# Altium PCB PCB_WallSwitch_Core.PcbDoc (part 1 of 2)
Units mm, origin at the board's own origin, x right, y up, seen from the top; angles counter-clockwise.
Board outline 41 x 41 mm, 4 copper layers (Top Layer, Ground Plane, Power Plane, Bottom Layer), stack 1.57 mm thick; 34 components, 47 nets, 196 pads, 64 vias.
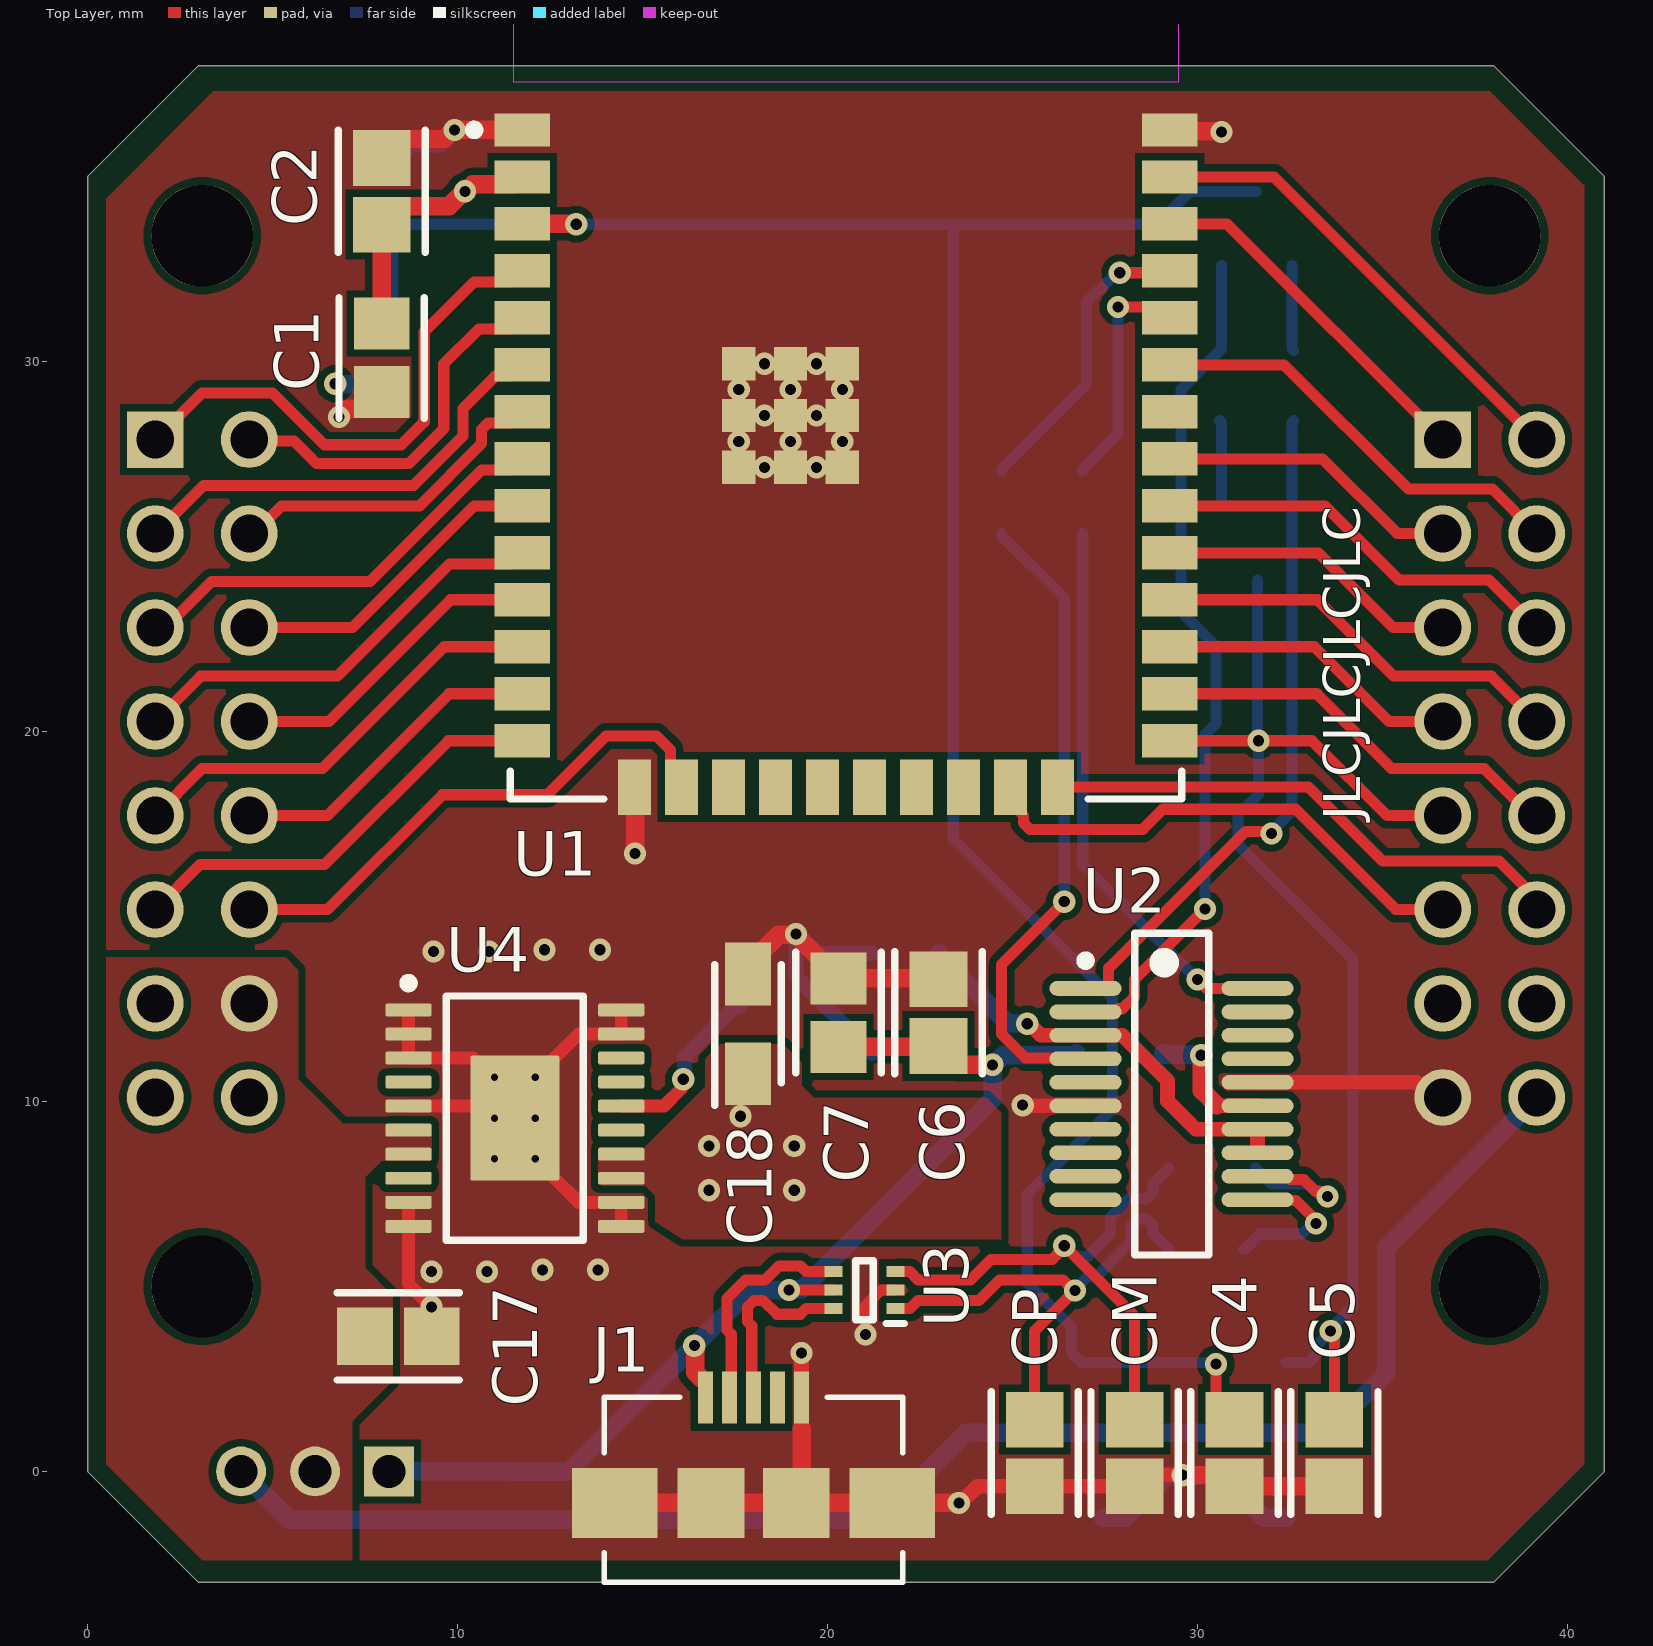
[diagram p0: Top Layer view]
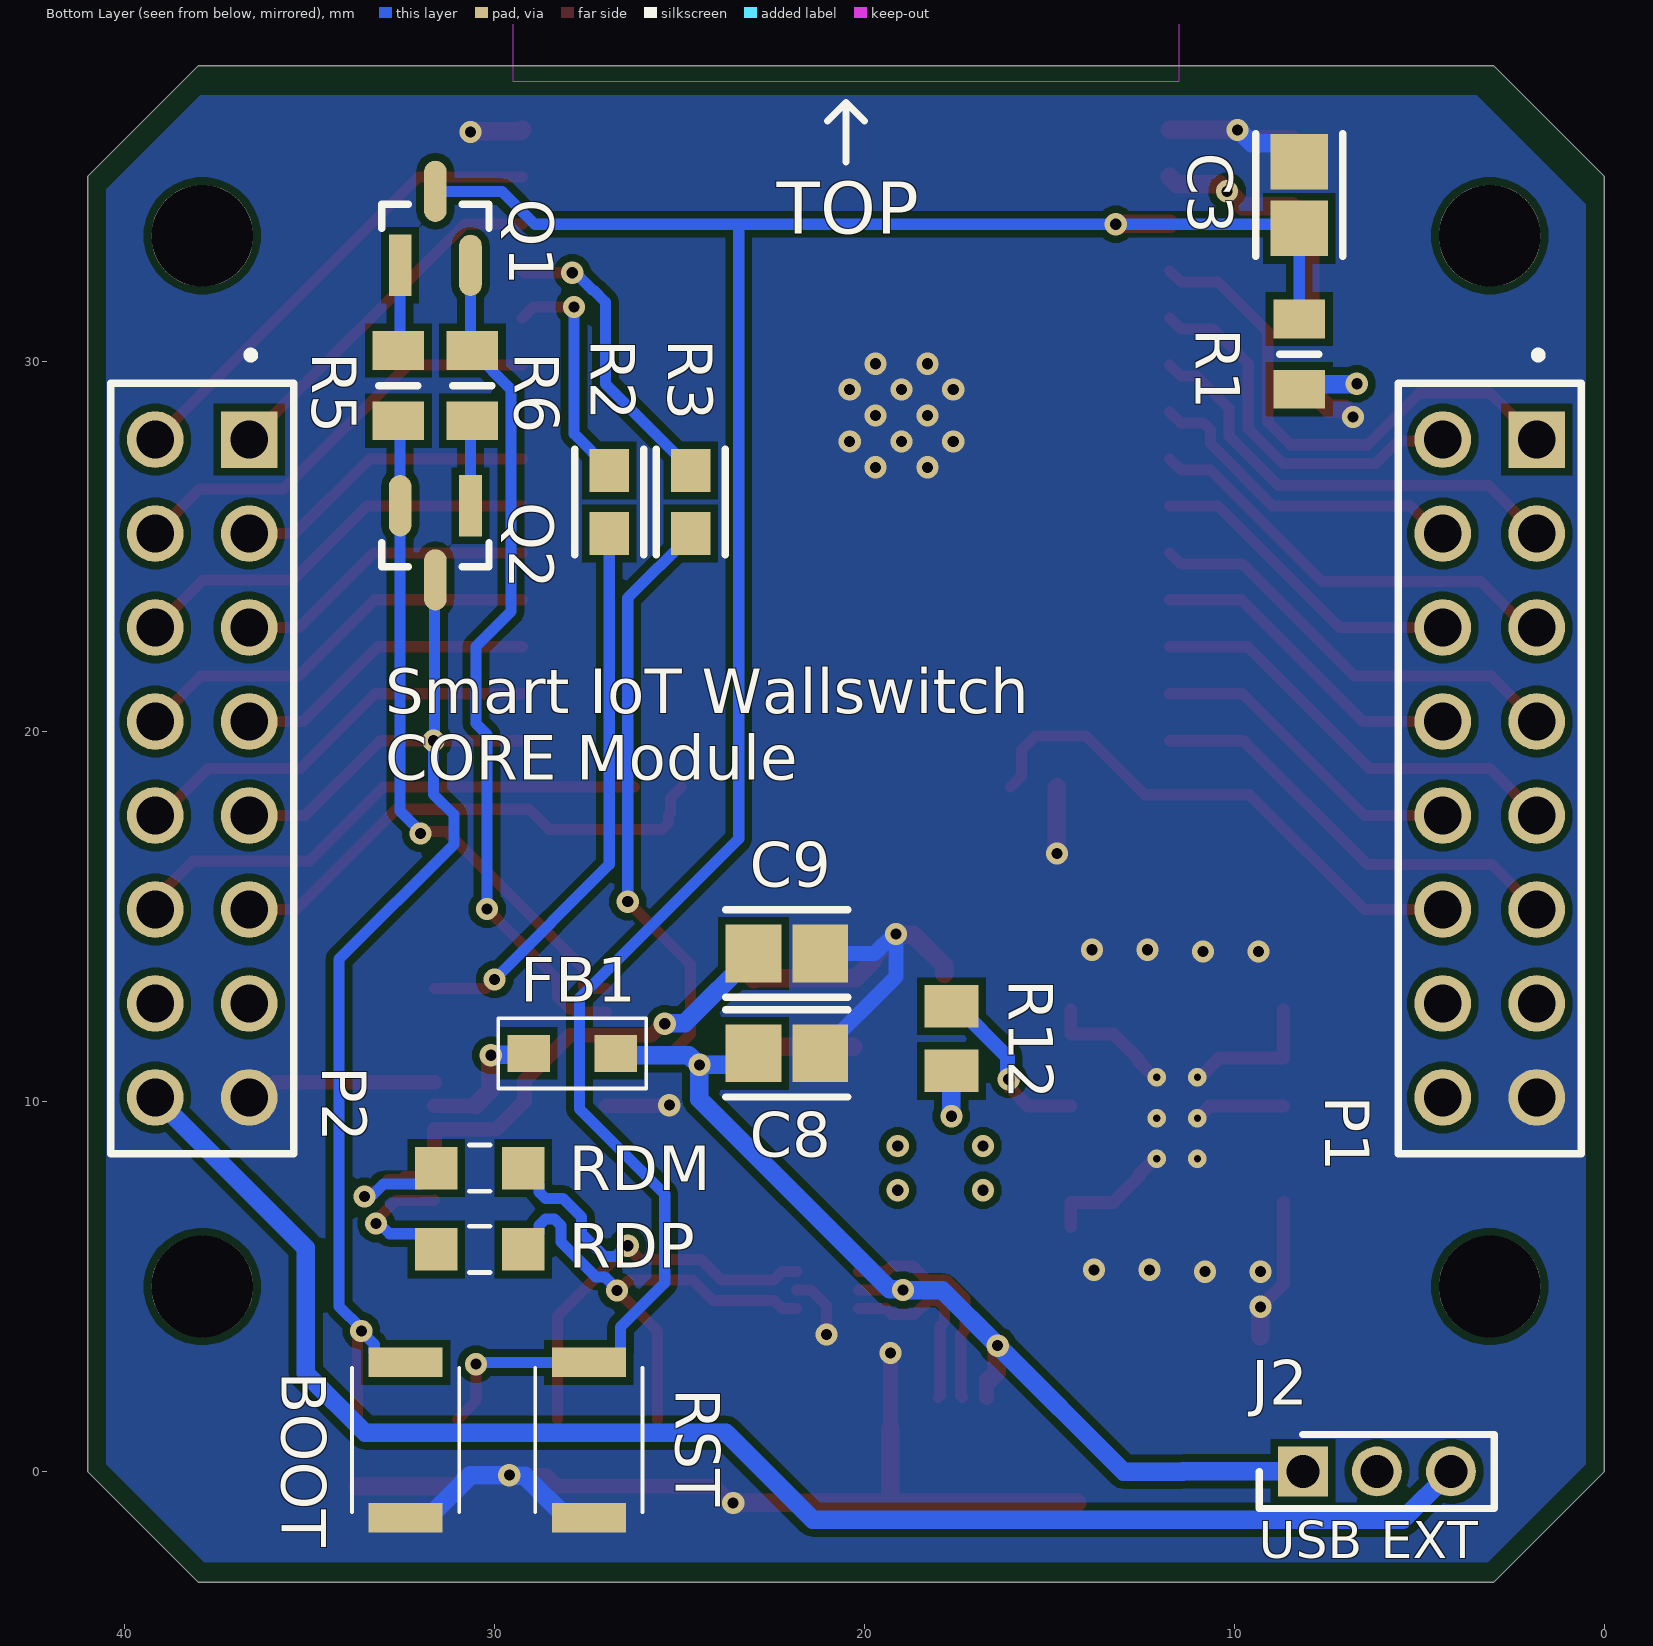
[diagram p1: Bottom Layer view, seen from below]
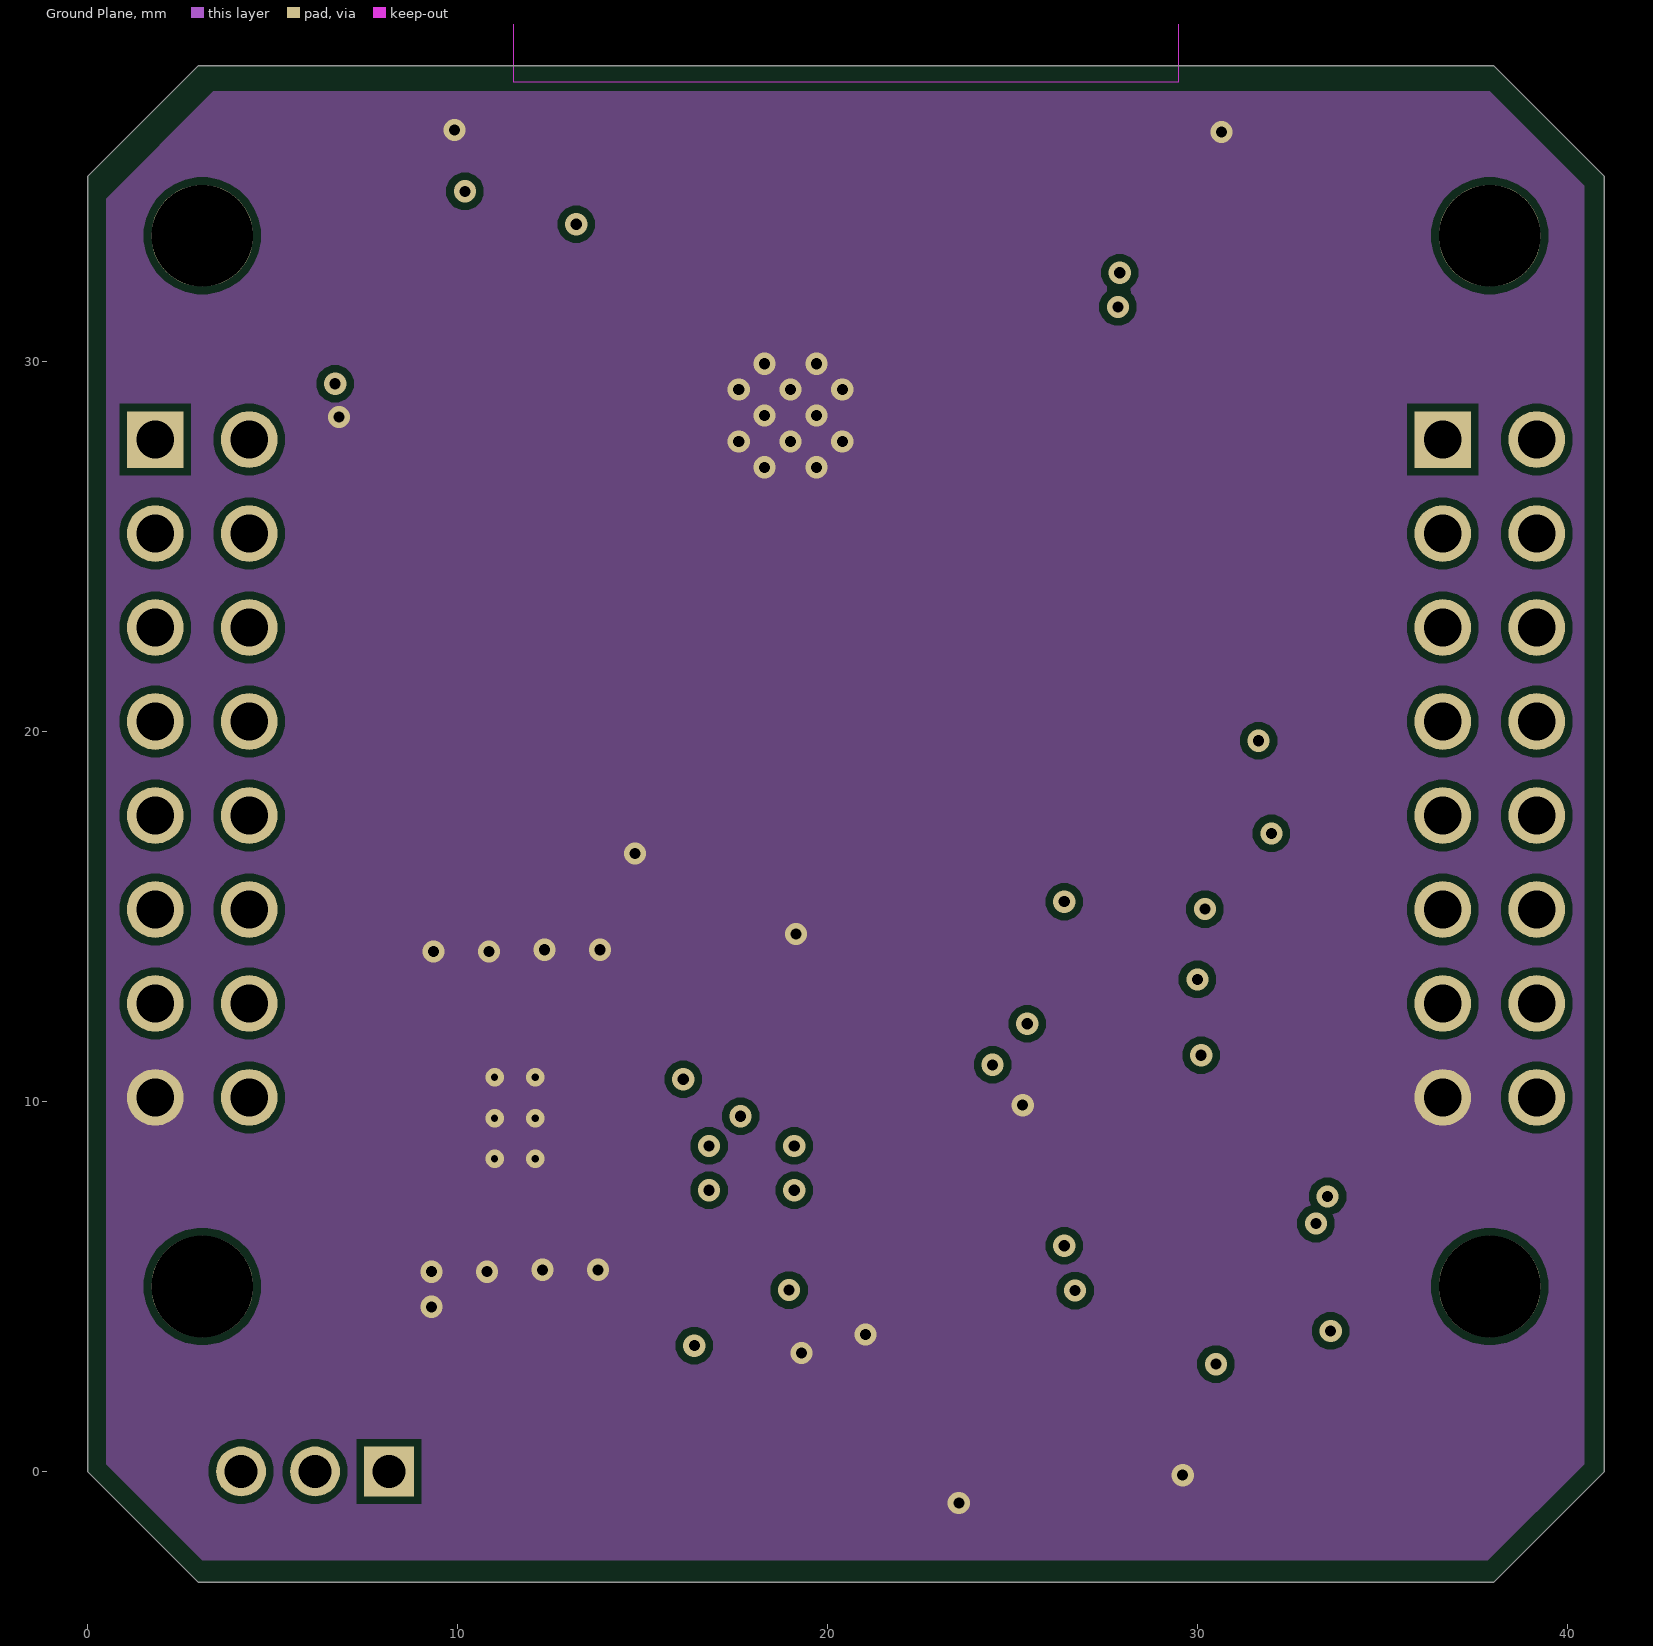
[diagram p2: Ground Plane]
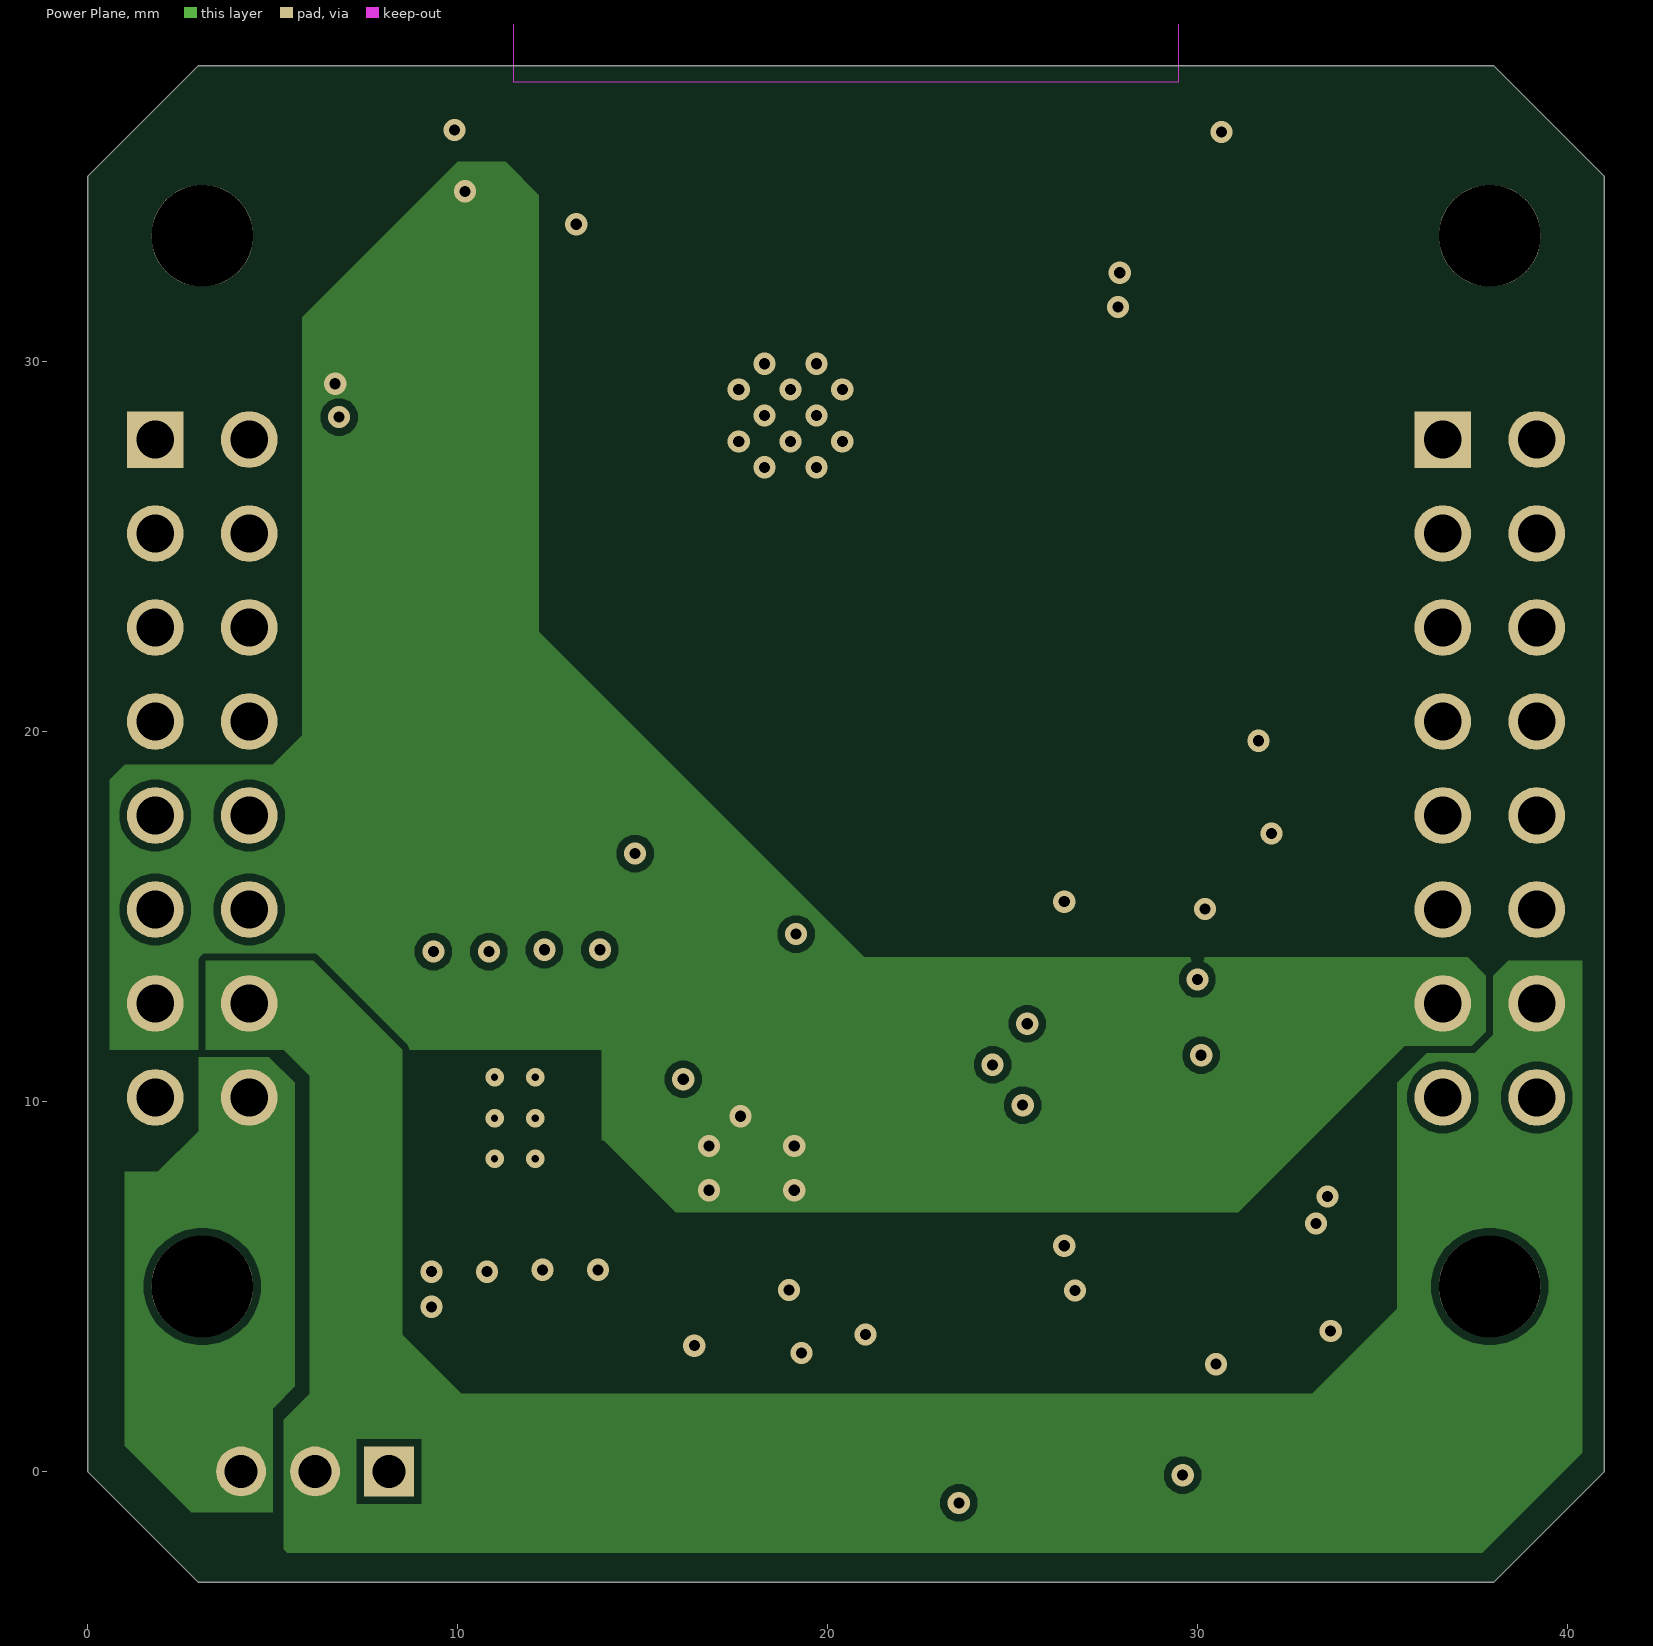
[diagram p3: Power Plane]
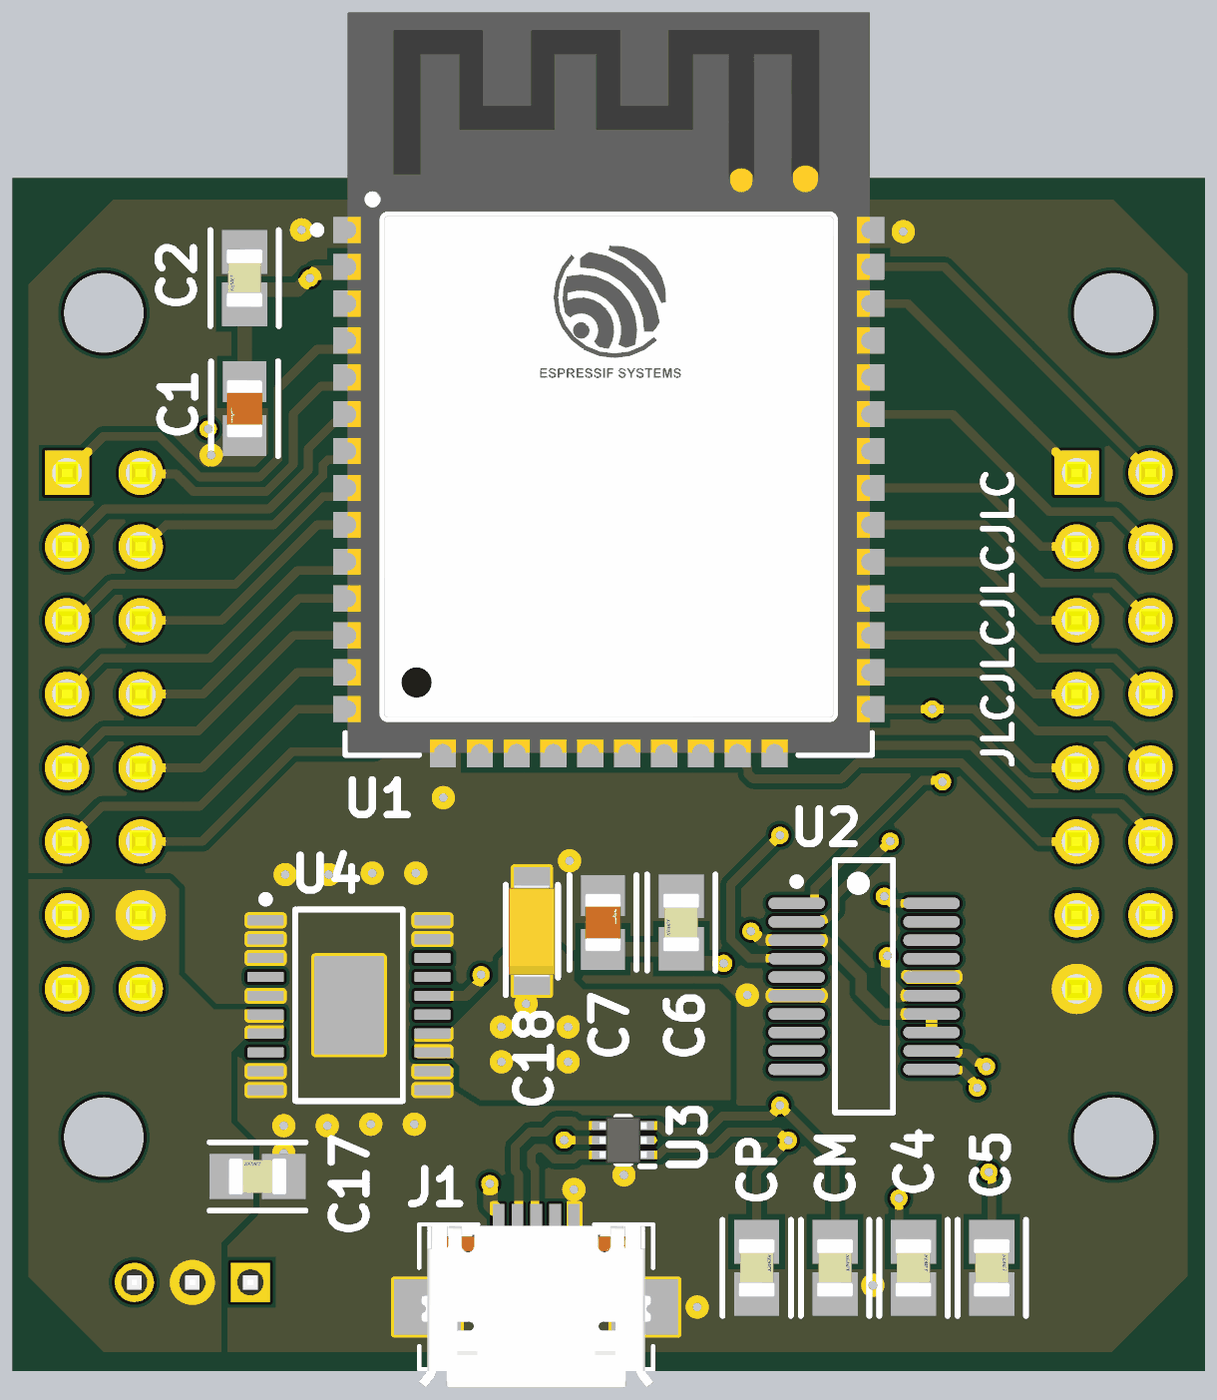
[diagram p4: 3D render of the assembled board from above, using the file's embedded part models]
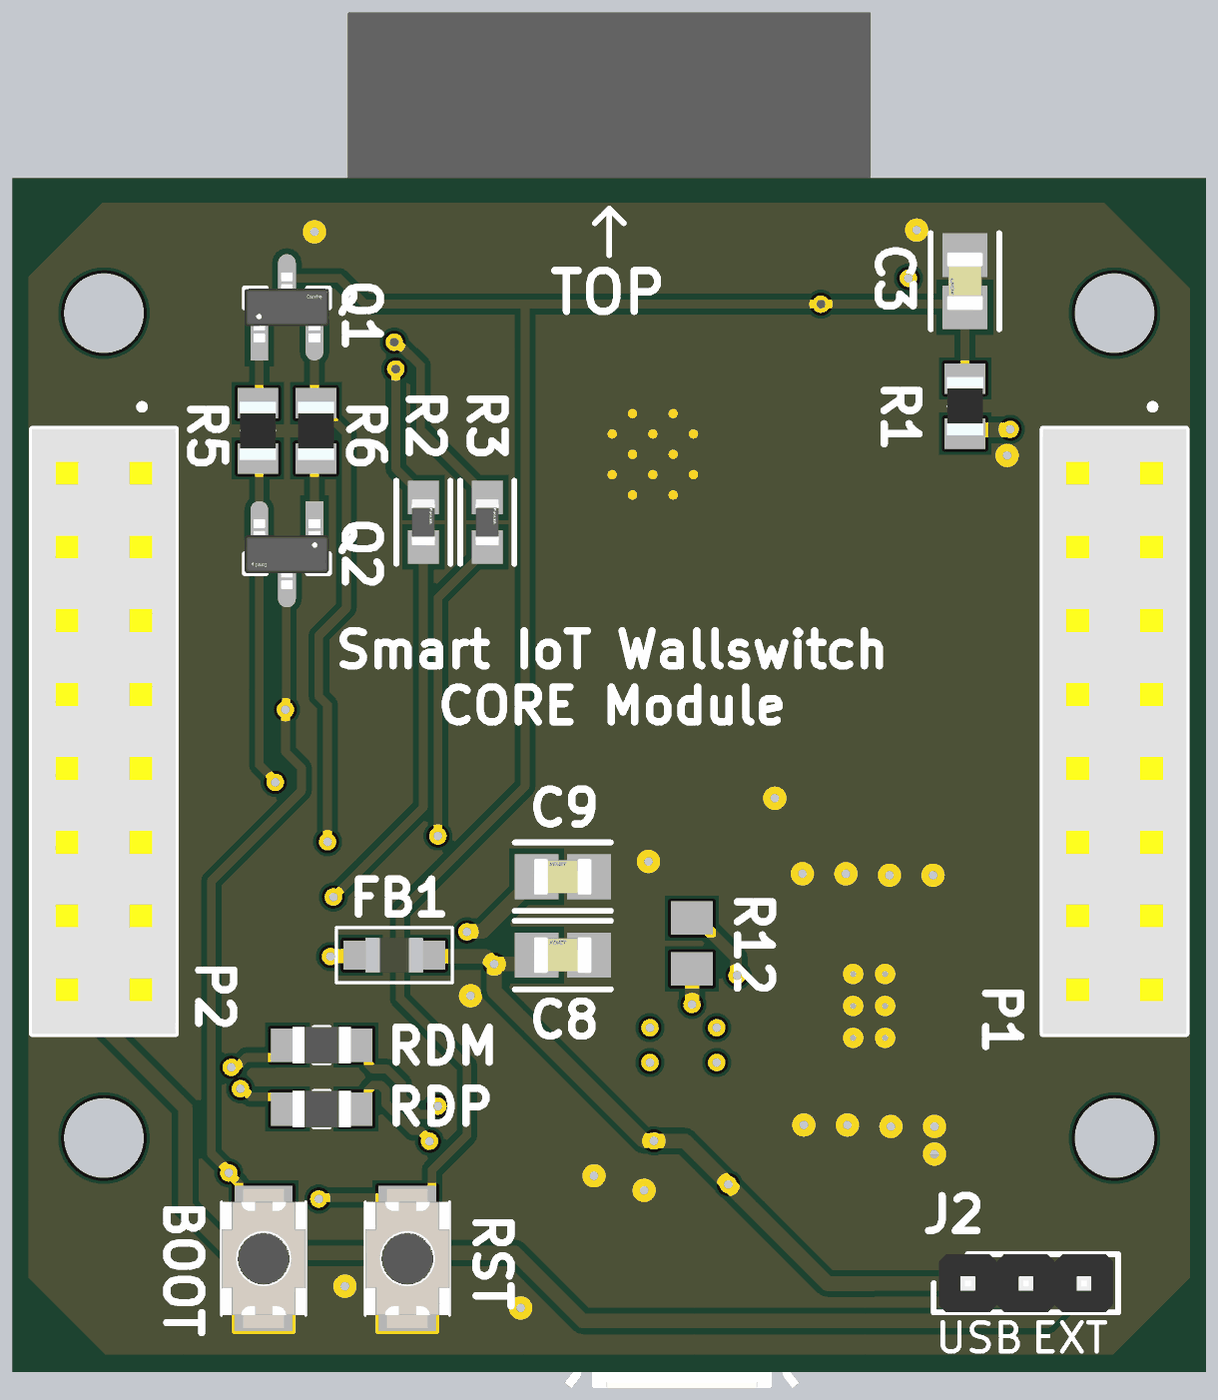
[diagram p5: 3D render of the assembled board from below, using the file's embedded part models]

## Layer stack, top to bottom
Top Solder: solder mask 0.015, Solder Resist, Dk 3.8
Top Layer: signal copper 0.035
Dielectric 2: prepreg 0.2, 7628, Dk 4.6
Ground Plane: signal copper 0.0175
Dielectric 1: dielectric 1.065, FR-4, Dk 4.5
Power Plane: signal copper 0.0175
Dielectric 3: prepreg 0.2, 7628, Dk 4.6
Bottom Layer: signal copper 0.035
Bottom Solder: solder mask 0.015, Solder Resist, Dk 3.8

## Board outline
0,0 3,-3 38,-3 41,0 41,35 38,38 3,38 0,35

## Design rules (kind name [scope] priority, off if disabled: settings)
BoardOutlineClearance [All] p1: gap=0.2 ignorepadtopadclearanceinfootprint=FALSE except(0.4: Arc-SplitBarrior Arc-SplitContinuation Track-SplitBarrior Track-SplitContinuation SMDPad-SplitBarrior SMDPad-SplitContinuation THPad-SplitBarrior THPad-SplitContinuation Via-SplitBarrior Via-SplitContinuation Fill-SplitBarrior Fill-SplitContinuation Poly-SplitBarrior Poly-SplitContinuation Region-SplitBarrior Region-SplitContinuation Text-SplitBarrior Text-SplitContinuation)
Clearance "Clearance Bottom Layer" [OnLayer('Bottom Layer')] p1: gap=0.2 ignorepadtopadclearanceinfootprint=TRUE except(0.254: Arc-Text Track-Text SMDPad-Text THPad-Text Via-Text Fill-Text Poly-Text Region-Text Text-Text)
Clearance "Clearance Top Layer" [OnLayer('Top Layer')] p2: gap=0.2 ignorepadtopadclearanceinfootprint=TRUE except(0.254: Arc-Text Track-Text SMDPad-Text THPad-Text Via-Text Fill-Text Poly-Text Region-Text Text-Text)
Clearance [All] p3: gap=0.2 ignorepadtopadclearanceinfootprint=FALSE except(0.089: Arc-Arc Arc-Track Arc-SMDPad Track-Track Track-SMDPad SMDPad-SMDPad; 0.127: Arc-Via Track-Via SMDPad-Via THPad-Via Via-Via; 0.254: Arc-Text Track-Text SMDPad-Text THPad-Text Via-Text Fill-Text Poly-Text Region-Text Text-Text)
DiffPairsRouting [All] p1: maxlimit=0.254 minlimit=0.2 mostfreqgap=0.254 toplayer_minwidth=0.3 toplayer_maxwidth=0.381 toplayer_prefwidth=0.381 midlayer1_mingap=0.254 midlayer1_minwidth=0.381 midlayer1_maxwidth=0.381 midlayer1_prefwidth=0.381 midlayer2_mingap=0.254 midlayer2_minwidth=0.381 midlayer2_maxwidth=0.381 midlayer2_prefwidth=0.381 bottomlayer_minwidth=0.3 bottomlayer_maxwidth=0.381 bottomlayer_prefwidth=0.381 maxuncoupledlength=12.7
HoleSize [All] p1: absolutevalues=TRUE maxlimit=6.3 minlimit=0.2 maxpercent=80.000 minpercent=20.000
MinimumAnnularRing [All] p1: minimumring=0.076
MinimumSolderMaskSliver [All] p1: minsoldermaskwidth=0.1
PlaneConnect [All] p1: planeconnectstyle=Direct reliefexpansion=0.508 reliefentries=4 reliefconductorwidth=0.254 reliefairgap=0.254
PolygonConnect PolygonConnect_1 [All] p1: connectstyle=Direct reliefconductorwidth=0.508 reliefentries=4 polygonreliefangle="90 Angle" airgapwidth=0.254
RoutingCorners [All] p1: cornerstyle=Round minsetback=2.54 maxsetback=2.54
RoutingVias [All] p1: holewidth=0.5 width=1 viastyle="Through Hole" minholewidth=0.2 minwidth=0.45 maxholewidth=1 maxwidth=2
SilkToSilkClearance [All] p1: silktosilkclearance=0.1
SilkToSolderMaskClearance [IsPad] p1: minsilkscreentomaskgap=0.1 clearancetoexposedcopper=TRUE
SolderMaskExpansion [All] p1: expansion=0.102 istentingtop=FALSE
Width [All] p1: maxlimit=2.54 minlimit=0.089 preferedwidth=0.381
23 further rules are at their usual default settings.

## Classes and differential pairs
differential pair USB_D: +USB_D_P -USB_D_N
differential pair USB_D1: +USB_D1_P -USB_D1_N
differential pair USB_D0: +USB_D0_P -USB_D0_N

## Components (designator, comment, footprint, x,y, rotation, side; value= is the part's Value field where it differs from the comment)
BOOT "SKRKAHE020" SKRKAEE020 32.4,0.85 r270 bottom
C1 "GRM21BR61A226ME51L" FP-GRM21B-0_15-IPC_A 7.95,30.1 r270 top
C2 "C0805C104K5RAC7411" FP-C0805C-DN-IPC_A 7.95,34.6 r90 top
C3 "C0805C104K5RAC7411" FP-C0805C-DN-IPC_A 8.25,34.5 r90 bottom
C4 "C0805C104K5RAC7411" FP-C0805C-DN-IPC_A 31,0.5 r270 top
C5 "C0805C104K5RAC7411" FP-C0805C-DN-IPC_A 33.7,0.5 r270 top
C6 "C0805C104K5RAC7411" FP-C0805C-DN-IPC_A 23,12.4 r90 top
C7 "GRM21BR71C475KE51L" FP-GRM21B-0_15-IPC_A 20.3,12.4 r90 top
C8 "C0805C103J5RAC7025" FP-C0805C-DN-IPC_A 22.1,11.3 r180 bottom
C9 "C0805C104K5RAC7411" FP-C0805C-DN-IPC_A 22.1,14 r180 bottom
C17 "C0805C473K5RACAUTO" FP-C0805C-DN-IPC_A 8.4,3.65 r0 top
C18 "T495A156K010ATE1K0" CAPPM3216X180N 17.85,12.1 r90 top
CM "C0805C470J5RACTU" FP-C0805C-DN-IPC_A 28.3,0.5 r270 top
CP "C0805C470J5RACTU" FP-C0805C-DN-IPC_A 25.6,0.5 r270 top
FB1 "74279202" SMD-0805 27.9,11.3 r0 bottom
J1 "10104110-0001LF" 101041100001LF 18,-0.85 r0 top
J2 "M22-2510346" HDRV3W50P0X200_1X3_600X200X525P 8.15,0 r180 bottom
P1 "SSQ-108-03-G-D" SAMTEC_SSQ-108-XX-X-D 3.1,19 r90 bottom locked
P2 "SSQ-108-03-G-D" SAMTEC_SSQ-108-XX-X-D 37.9,19 r90 bottom locked
Q1 "SS8050-G" FP-SS8050-G-IPC_A 31.6,33.6 r90 bottom
Q2 "SS8050-G" FP-SS8050-G-IPC_A 31.6,25.1 r270 bottom
R1 "ERJ-UP6J103V" RESC2012X70N 8.25,30.2 r90 bottom
R2 "ERJ-3GEYJ102V" FP-ERJ3G-IPC_A 26.9,26.2 r270 bottom
R3 "ERJ-3GEYJ102V" FP-ERJ3G-IPC_A 24.7,26.2 r270 bottom
R5 "ERJ-UP6J103V" RESC2012X70N 32.6,29.35 r90 bottom
R6 "ERJ-UP6J103V" RESC2012X70N 30.6,29.35 r270 bottom
R12 "ERJ-6ENF2493V" RESC2013X70X40NL20T20 17.65,11.7 r90 bottom
RDM "ERJ-P06F27R0V" RES_ERJP06F27R0V 30.4,8.2 r0 bottom
RDP "ERJ-P06F27R0V" RES_ERJP06F27R0V 30.4,6 r0 bottom
RST "SKRKAHE020" SKRKAEE020 27.45,0.85 r270 bottom
U1 "ESP32-WROOM-32D-N16" FP-ESP32-WROOM-32D_16MB-MFG 20.5,31 r0 top
U2 "FT231XS-U" SSOP-20_L 29.3,10.2 r0 top
U3 "RCLAMP0502A.TCT" SOTFL50P162X60-6N 21,4.9 r180 top
U4 "TPS76733QPWPRQ1" PWP0020L_L 11.55,9.55 r0 top

## Footprints (in the part's own frame and the unit in brackets; to place one, negate y for a bottom-side part, rotate by r counter-clockwise, add the part's x,y. Pads: shape width x height; smd on the part's side, far side on the other; paste and mask are expansions set on the pad)
101041100001LF [mm]
  rect 0.4x1.4 smd: 1(-1.3,2.85) 2(-0.65,2.85) 3(0,2.85) 4(0.65,2.85) 5(1.3,2.85)
  rect 1.8x1.9 smd: 6(-1.15,0) 7(1.15,0)
  rect 2.3x1.9 smd: 8(-3.75,0) 9(3.75,0)
  silkscreen extent -4.03,-2.15 4.03,2.85, body extent -4.04,-2.77 4.04,2.8, height 2.76
CAPPM3216X180N [mm]
  rect 1.7x1.25 smd: 1(-1.35,0) 2(1.35,0)
  silkscreen extent -2.2,-0.9 1.6,0.9, body extent -1.6,-0.8 1.6,0.8, height 1.8
FP-C0805C-DN-IPC_A [mm]
  rect 1.505x1.556 smd paste+0 mask+0: 1(-0.901,0) 2(0.901,0)
  silkscreen extent -1.65,-1.18 1.65,1.18, body extent -2.15,-1.28 2.15,1.28, height 0.25
FP-ERJ3G-IPC_A [mil]
  rect 45.53x41.82 smd paste+0 mask+0: 1(-33.5,0) 2(33.5,0)
  silkscreen extent -56,-37 56,37, body extent -31,-16 31,16, height 22
FP-ESP32-WROOM-32D_16MB-MFG [mm]
  rect 1.5x0.9 smd paste+0 mask+0: 1(-8.75,5.26) 2(-8.75,3.99) 3(-8.75,2.72) 4(-8.75,1.45) 5(-8.75,0.18) 6(-8.75,-1.09) 7(-8.75,-2.36) 8(-8.75,-3.63) 9(-8.75,-4.9) 10(-8.75,-6.17) 11(-8.75,-7.44) 12(-8.75,-8.71) 13(-8.75,-9.98) 14(-8.75,-11.25) 25(8.75,-11.25) 26(8.75,-9.98) 27(8.75,-8.71) 28(8.75,-7.44) 29(8.75,-6.17) 30(8.75,-4.9) 31(8.75,-3.63) 32(8.75,-2.36) 33(8.75,-1.09) 34(8.75,0.18) 35(8.75,1.45) 36(8.75,2.72) 37(8.75,3.99) 38(8.75,5.26)
  rect 0.9x1.5 smd paste+0 mask+0: 15(-5.715,-12.5) 16(-4.445,-12.5) 17(-3.175,-12.5) 18(-1.905,-12.5) 19(-0.635,-12.5) 20(0.635,-12.5) 21(1.905,-12.5) 22(3.175,-12.5) 23(4.445,-12.5) 24(5.715,-12.5)
  rect 0.9x0.9 smd paste+0 mask+0: 39(-2.9,-3.86) 39(-2.9,-2.46) 39(-2.9,-1.06) 39(-1.5,-3.86) 39(-1.5,-2.46) 39(-1.5,-1.06) 39(-0.1,-3.86) 39(-0.1,-2.46) 39(-0.1,-1.06)
  Keep-Out Layer region: -9,6.56 9,6.56 9,12.75 -9,12.75
  silkscreen extent -10.17,-12.83 9.08,5.38, body extent -9.6,-13.35 9.6,12.93, height 0.25
FP-GRM21B-0_15-IPC_A [mm]
  rect 1.406x1.508 smd paste+0 mask+0: 1(-0.926,0) 2(0.926,0)
  silkscreen extent -1.63,-1.15 1.63,1.15, body extent -2.13,-1.25 2.13,1.25, height 0.25
FP-SS8050-G-IPC_A [mm]
  rect 1.657x0.612 smd paste+0 mask+0: 1(-1.001,0.95)
  rrect100% 1.657x0.612 smd paste+0 mask+0: 2(-1.001,-0.95) 3(1.001,0)
  silkscreen extent 0,-1.45 0.65,1.45, body extent -1.21,-1.45 1.21,1.45, height 1.15
HDRV3W50P0X200_1X3_600X200X525P [mm]
  rect 1.35x1.35 hole 0.9: 1(0,0)
  round 1.35 hole 0.9: 2(2,0) 3(4,0)
  silkscreen extent -1.17,-1 5.18,1, body extent -1,-1 5,1, height 4.91
PWP0020L_L [mm] "SOP, 20-Leads, Body 6.6x4.5mm, Pitch 0.65mm, Thermal Pad 3.38x2.4mm, IPC High Density"
  rrect29% 1.25x0.35 smd: 1(-2.875,2.925) 2(-2.875,2.275) 3(-2.875,1.625) 4(-2.875,0.975) 5(-2.875,0.325) 6(-2.875,-0.325) 7(-2.875,-0.975) 8(-2.875,-1.625) 9(-2.875,-2.275) 10(-2.875,-2.925) 11(2.875,-2.925) 12(2.875,-2.275) 13(2.875,-1.625) 14(2.875,-0.975) 15(2.875,-0.325) 16(2.875,0.325) 17(2.875,0.975) 18(2.875,1.625) 19(2.875,2.275) 20(2.875,2.925)
  rrect4% 2.4x3.38 smd: 21(0,0)
  silkscreen extent -3,-3.3 1.85,3.77, body extent -2.25,-3.3 2.25,3.3, height 1.2
RES_ERJP06F27R0V [mm]
  rect 1.15x1.15 smd: 1(-1.175,0) 2(1.175,0)
  silkscreen extent -0.28,-0.63 0.28,0.63, body extent -1,-0.63 1,0.63, height 0.6
RESC2012X70N [mm]
  rect 1.05x1.4 smd: 1(-0.95,0) 2(0.95,0)
  silkscreen extent 0,-0.53 0,0.53, body extent -1,-0.63 1,0.63, height 0.7
RESC2013X70X40NL20T20 [mm] "Chip Resistor, 2-Leads, Body 2.00x1.25mm, IPC Medium Density"
  rect 1.15x1.45 smd: 1(-0.875,0) 2(0.875,0)
  body extent -1.1,-0.72 1.1,0.72, height 0.7
SAMTEC_SSQ-108-XX-X-D [mm]
  rect 1.53x1.53 hole 1.02: 01(8.89,-1.27)
  round 1.53 hole 1.02: 02(8.89,1.27) 03(6.35,-1.27) 04(6.35,1.27) 05(3.81,-1.27) 06(3.81,1.27) 07(1.27,-1.27) 08(1.27,1.27) 09(-1.27,-1.27) 10(-1.27,1.27) 11(-3.81,-1.27) 12(-3.81,1.27) 13(-6.35,-1.27) 14(-6.35,1.27) 15(-8.89,-1.27) 16(-8.89,1.27)
  silkscreen extent -10.42,-2.47 11.27,2.47, body extent -10.41,-2.48 10.41,2.48, height 8.51
SKRKAEE020 [mm]
  rect 0.8x2 smd: 1(-2.1,0) 2(2.1,0)
  silkscreen extent -1.95,-1.45 1.95,1.45, body extent -2.4,-1.45 2.4,1.45, height 2
SMD-0805 [mm] "Chip Inductor, 2-Leads, Body 2.0x1.2mm"
  rect 1.15x1 smd: 1(-1.175,0) 2(1.175,0)
  silkscreen extent -2,-0.95 2,0.95, body extent -1,-0.6 1,0.6, height 0.89
SOTFL50P162X60-6N [mm]
  rect 0.492x0.3 smd: 1(-0.834,0.5) 2(-0.834,0) 3(-0.834,-0.5) 4(0.834,-0.5) 5(0.834,0) 6(0.834,0.5)
  silkscreen extent -1.08,-0.8 0.24,0.9, body extent -0.81,-0.8 0.81,0.8, height 0.6
SSOP-20_L [mm] "SOP, 20-Leads, Body 8.6x3.9mm, Pitch 0.635mm, IPC High Density"
  oval 1.95x0.4 smd: 1(-2.325,2.857) 2(-2.325,2.222) 3(-2.325,1.587) 4(-2.325,0.953) 5(-2.325,0.318) 6(-2.325,-0.318) 7(-2.325,-0.953) 8(-2.325,-1.587) 9(-2.325,-2.222) 10(-2.325,-2.857) 11(2.325,-2.857) 12(2.325,-2.222) 13(2.325,-1.587) 14(2.325,-0.953) 15(2.325,-0.318) 16(2.325,0.318) 17(2.325,0.953) 18(2.325,1.587) 19(2.325,2.222) 20(2.325,2.857)
  silkscreen extent -2.45,-4.35 1,4.35, body extent -1.99,-4.37 1.99,4.37, height 1.76

## Part data
BOOT RST: "Switch Tactile N.O. SPST Round Button Gull Wing 0.05A 12VDC 0.98N SMD T/R", Manufacturer="Alps Electric", Supplier Part Number 1=688-SKRKAHE010, Category="Tactile Switches", Manufacturer Part Number=SKRKAHE020, Pricing 1="1=0,76000, 10=0,67100, 50=0,60600, 100=0,57700, 1000=0,46700, 10000=0,45000 (USD)", RoHS=Yes, RoHS Compliant=Yes, Stock 1=28067, Supplier 1=Mouser
C1: "贴片电容（MLCC） 22µF ±20% 10V X5R 0805", Capacitance=22uF, Case Code (Imperial)=0805, Case Code (Metric)=2012, Dielectric=X5R, Manufacturer=Murata, Max Operating Temperature=85°C, Min Operating Temperature=-55°C, Package Quantity=3000, Supplier Part Number 1=81-GRM21BR61A226ME1L, Tolerance=20%, Voltage Rating=10V, Case/Package=0805, Category="Ceramic Capacitors", ComponentLink1Description=http://www.farnell.com/datasheets/1955716.pdf?src-supplier=Farnell, ComponentLink1URL=http://www.farnell.com/datasheets/1955716.pdf?src-supplier=Farnell, ComponentLink2Description=http://www.mouser.com/ds/2/281/c02e-2905.pdf?src-supplier=Mouser, ComponentLink2URL=http://www.mouser.com/ds/2/281/c02e-2905.pdf?src-supplier=Mouser, ComponentLink3Description=http://www.farnell.com/datasheets/1955716.pdf?src-supplier=Newark, ComponentLink3URL=http://www.farnell.com/datasheets/1955716.pdf?src-supplier=Newark, ComponentLink4Description=http://www.farnell.com/datasheets/1955716.pdf?src-supplier=Element14, ComponentLink4URL=http://www.farnell.com/datasheets/1955716.pdf?src-supplier=Element14, ComponentLink5Description=http://search.murata.co.jp/Ceramy/image/img/A01X/G101/ENG/GRM21BR61A226ME51-01.pdf?src-supplier=Digi-Key, ComponentLink5URL=http://search.murata.co.jp/Ceramy/image/img/A01X/G101/ENG/GRM21BR61A226ME51-01.pdf?src-supplier=Digi-Key, ComponentLink6Description=http://psearch.en.murata.com/capacitor/product/GRM21BR61A226ME51%23.html?src-supplier=Avnet, ComponentLink6URL=http://psearch.en.murata.com/capacitor/product/GRM21BR61A226ME51%23.html?src-supplier=Avnet, Depth=1.25mm, Height=1.25mm, Lead Free="Lead Free", Length=2mm, Manufacturer Part Number=GRM21BR61A226ME51L, Mount="Surface Mount", Packaging="Tape and Reel", Pricing 1="1=0,28000, 10=0,19200, 50=0,19200, 100=0,10900, 500=0,07700, 1000=0,06800, 3000=0,06300, 6000=0,05900, 10000=0,05900 (USD)", Radiation Hardening=No, REACH SVHC="No SVHC", RoHS=Yes, RoHS Compliant=Yes, Stock 1=1508057, Supplier 1=Mouser, Termination=SMD/SMT, Thickness=0.055inch, Voltage Rating (DC)=10V, Weight=0.000335oz, Width=0.049inch
C2 C3 C4 C5 C6 C9: "Cap Ceramic 0.1uF 50V X7R 10% SMD 0805 125°C Paper T/R", Capacitance=100nF, Case/Package=0805, Dielectric=X7R, Dielectric Material=Ceramic, Manufacturer=KEMET, Max Operating Temperature=125°C, Min Operating Temperature=-55°C, Supplier Part Number 1=80-C0805C104K5RACLR, Tolerance=10%, Voltage Rating (DC)=50V, Category="Ceramic Capacitors", ComponentLink1Description=http://components.arrow.com/part/dataview/30748302S8994022N7429?src-supplier=Arrow+Electronics, ComponentLink1URL=http://components.arrow.com/part/dataview/30748302S8994022N7429?src-supplier=Arrow+Electronics, ComponentLink2Description=https://www.verical.com/server-webapp/html/getDatasheet?partID=248513&src-supplier=Verical, ComponentLink2URL=https://www.verical.com/server-webapp/html/getDatasheet?partID=248513&src-supplier=Verical, Construction=Flat, Depth=1.25mm, Height=0.9mm, Length=2mm, Manufacturer Part Number=C0805C104K5RAC7411, Mount="Surface Mount", Packaging="Tape and Reel", Pricing 1="1=0,13000, 10=0,09300, 50=0,09300, 100=0,04400, 500=0,03100, 1000=0,02600, 2500=0,02400, 5000=0,02200, 10000=0,02100, 15000=0,02000 (USD)", Radiation Hardening=No, RoHS=Yes, RoHS Compliant=Yes, Stock 1=1484324, Supplier 1=Mouser
C7: "Cap Ceramic 4.7uF 16V X7R 10% SMD 0805 125°C Embossed Plastic T/R", Capacitance=4.7uF, Case/Package=0805, Dielectric=X7R, Manufacturer=Murata, Supplier Part Number 1=81-GRM21BR71C475KE1L, Tolerance=10%, Voltage Rating (DC)=16V, Category="Ceramic Capacitors", ComponentLink1Description=http://www.farnell.com/datasheets/2189142.pdf?src-supplier=Farnell, ComponentLink1URL=http://www.farnell.com/datasheets/2189142.pdf?src-supplier=Farnell, ComponentLink2Description=http://search.murata.co.jp/Ceramy/image/img/A01X/G101/ENG/GRM21BR71C475KE51-01.pdf?src-supplier=Digi-Key, ComponentLink2URL=http://search.murata.co.jp/Ceramy/image/img/A01X/G101/ENG/GRM21BR71C475KE51-01.pdf?src-supplier=Digi-Key, Length=2mm, Manufacturer Part Number=GRM21BR71C475KE51L, Pricing 1="1=0,19000, 10=0,13400, 50=0,13400, 100=0,06400, 500=0,04500, 1000=0,03700, 3000=0,03500, 6000=0,03300, 10000=0,03300 (USD)", RoHS=Yes, RoHS Compliant=Yes, Stock 1=388295, Supplier 1=Mouser, Thickness=1.25mm, Width=1.25mm
C8: "Cap Ceramic 0.01uF 50V X7R 5% SMD 0805 125°C Paper T/R", Capacitance=10nF, Case Code (Imperial)=0805, Case Code (Metric)=2012, Dielectric=X7R, Dielectric Material=Ceramic, Manufacturer=KEMET, Max Operating Temperature=125°C, Min Operating Temperature=-55°C, Package Quantity=4000, Supplier Part Number 1=80-C0805C103J5RACTM, Tolerance=5%, Voltage Rating=50V, Case/Package=0805, Category="Ceramic Capacitors", ComponentLink1Description=http://www.mouser.com/ds/2/212/KEM_C1002_X7R_SMD-1102033.pdf?src-supplier=Mouser, ComponentLink1URL=http://www.mouser.com/ds/2/212/KEM_C1002_X7R_SMD-1102033.pdf?src-supplier=Mouser, Construction=Flat, Depth=1.25mm, Height=0.78mm, Lead Pitch=0.75mm, Length=2mm, Manufacturer Part Number=C0805C103J5RAC7025, Mount="Surface Mount", Packaging="Tape and Reel", Pricing 1="1=0,12000, 10=0,07600, 50=0,07600, 100=0,03600, 1000=0,02300, 10000=0,01800 (USD)", Radiation Hardening=No, RoHS=Yes, RoHS Compliant=Yes, Series=C0805C, Stock 1=20879, Supplier 1=Mouser, Termination=SMD/SMT, Voltage Rating (DC)=50V
C17: "KEMET   C0805C473K5RACAUTO   Multilayer Ceramic Capacitor, AEC-Q200 MLCC Series, 0.047 F,  10%, X7R, 50 V", Capacitance=47nF, Case Code (Imperial)=0805, Case Code (Metric)=2012, Dielectric=X7R, Dielectric Material=Ceramic, Manufacturer=KEMET, Max Operating Temperature=125°C, Min Operating Temperature=-55°C, Package Quantity=1, Ratings=AEC-Q200, Supplier Part Number 1=80-C0805C473K5RAUTO, Tolerance=10%, Voltage Rating=50V, Case/Package=0805, Category="Ceramic Capacitors", ComponentLink1Description=https://datasheet.ciiva.com/7842/1633156-7842358.pdf?src-supplier=Element14, ComponentLink1URL=https://datasheet.ciiva.com/7842/1633156-7842358.pdf?src-supplier=Element14, ComponentLink2Description=https://datasheet.ciiva.com/22704/1633156-22704879.pdf?src-supplier=Element14, ComponentLink2URL=https://datasheet.ciiva.com/22704/1633156-22704879.pdf?src-supplier=Element14, Construction=Flat, Contact Plating=Tin,Matte, Depth=1.25mm, Height=0.78mm, Length=2mm, Manufacturer Part Number=C0805C473K5RACAUTO, Mount="Surface Mount", Packaging="Tape and Reel", Pricing 1="1=0,19000, 10=0,07900, 50=0,07900, 100=0,06700, 500=0,04600, 1000=0,04100, 4000=0,03800, 8000=0,03700, 10000=0,03700, 12000=0,03600, 24000=0,03500 (USD)", Radiation Hardening=No, REACH SVHC="No SVHC", RoHS=Yes, RoHS Compliant=Yes, Series=C, Stock 1=55914, Supplier 1=Mouser, Termination=SMD/SMT, Thickness=0.035inch, Voltage Rating (DC)=50V, Width=0.049inch
C18: "Cap Tant Solid 15uF 10V A CASE 10% (3.2 X 1.6 X 1.6mm) Inward L SMD 3216-18 1 Ohm 125C Automotive T/R", Capacitance=15uF, Case Code (Imperial)=1206, Case Code (Metric)=3216, ESR (Equivalent Series Resistance)=1R, Manufacturer=KEMET, Max Operating Temperature=125°C, Min Operating Temperature=-55°C, Package Quantity=2000, Supplier Part Number 1=80-T495A156K10ATE1K0, Tolerance=10%, Voltage Rating=10V, Case/Package=1206, Category="Tantalum Capacitors", ComponentLink1Description=http://www.kemet.com/docfinder?Partnumber=T495A156K010ATE1K0&src-supplier=Digi-Key, ComponentLink1URL=http://www.kemet.com/docfinder?Partnumber=T495A156K010ATE1K0&src-supplier=Digi-Key, ComponentLink2Description=https://api.kemet.com/component-edge/download/datasheet/T495A156K010ATE1K0.pdf?src-supplier=Digi-Key, ComponentLink2URL=https://api.kemet.com/component-edge/download/datasheet/T495A156K010ATE1K0.pdf?src-supplier=Digi-Key, Features="General Purpose", Height - Seated (Max)=0.071inch, Length=0.126inch, Life (Hours)=2000Hour, Manufacturer Part Number=T495A156K010ATE1K0, Mount="Surface Mount", Packaging="Tape and Reel", Pricing 1="1=0,73000, 10=0,59100, 50=0,44700, 100=0,38900, 1000=0,30900, 10000=0,28100 (USD)", RoHS=Yes, RoHS Compliant=Yes, Stock 1=278, Supplier 1=Mouser, Width=0.063inch
CM CP: "47.0Pf 50.0V Rohs Compliant: Yes", Capacitance=47pF, Manufacturer=KEMET, Supplier Part Number 1=80-C0805C470J5RACTU, Category="Ceramic Capacitors", Manufacturer Part Number=C0805C470J5RACTU, Pricing 1="1=0,28000, 10=0,19800, 50=0,19800, 100=0,11200, 1000=0,06900, 10000=0,06000 (USD)", RoHS=Yes, RoHS Compliant=Yes, Stock 1=9354, Supplier 1=Mouser
FB1: "Ferrite SMD Construction form: 0805 DC resistance: 0.1 Ohm Impedance @ 100 MHz: 120 Ohm", Case Code (Imperial)=0805, Case Code (Metric)=2012, Case/Package=SMD/SMT, Current Rating=500mA, DC Resistance (DCR)=100mR, Manufacturer="Wurth Electronics", Max Operating Temperature=125°C, Min Operating Temperature=-55°C, Package Quantity=1, Supplier Part Number 1=710-74279202, Test Frequency=100MHz, Tolerance=25%, Category="Ferrite Beads and Chips", ComponentLink1Description=https://datasheet.ciiva.com/1126/1696029-1126528.pdf?src-supplier=Element14, ComponentLink1URL=https://datasheet.ciiva.com/1126/1696029-1126528.pdf?src-supplier=Element14, ComponentLink2Description=https://datasheet.ciiva.com/11795/0900766b80bbd134-11795958.pdf?src-supplier=RSComponents, ComponentLink2URL=https://datasheet.ciiva.com/11795/0900766b80bbd134-11795958.pdf?src-supplier=RSComponents, ComponentLink3Description=https://datasheet.ciiva.com/4940/74279202-50314-4940485.pdf?src-supplier=Mouser, ComponentLink3URL=https://datasheet.ciiva.com/4940/74279202-50314-4940485.pdf?src-supplier=Mouser, ComponentLink4Description=https://datasheet.ciiva.com/6212/74279202-6212647.pdf?src-supplier=Digi-Key, ComponentLink4URL=https://datasheet.ciiva.com/6212/74279202-6212647.pdf?src-supplier=Digi-Key, ComponentLink5Description=https://datasheet.ciiva.com/22711/1696029-22711339.pdf?src-supplier=Element14, ComponentLink5URL=https://datasheet.ciiva.com/22711/1696029-22711339.pdf?src-supplier=Element14, ComponentLink6Description=https://datasheet.ciiva.com/6212/74279202-6212651.pdf?src-supplier=Digi-Key, ComponentLink6URL=https://datasheet.ciiva.com/6212/74279202-6212651.pdf?src-supplier=Digi-Key, ComponentLink7Description=https://datasheet.ciiva.com/6212/74279202-6212654.pdf?src-supplier=Digi-Key, ComponentLink7URL=https://datasheet.ciiva.com/6212/74279202-6212654.pdf?src-supplier=Digi-Key, Depth=1.24mm, Height=0.9mm, Impedance=120R, Lead Free="Lead Free", Length=2mm, Manufacturer Part Number=74279202, Max Current Rating=500mA, Max DC Current=500mA, Mount="Surface Mount", Number of Lines=1, Packaging="Tape and Reel", REACH SVHC=Unknown, Resistance=100mR, RoHS=Yes, RoHS Compliant=Yes, Series=WE-CBF, Supplier 1=Mouser, Termination=SMD/SMT, Weight=0.000388oz, Width=1.2mm
J1: "Conn Micro USB 2.0 Type B RCP 5 POS 0.65mm Solder RA SMD 5 Terminal 1 Port T/R", Manufacturer="Amphenol ICC / FCI", Supplier Part Number 1=649-10104110-0001LF, Category="USB Connectors", ComponentLink1Description=https://datasheet.ciiva.com/11731/0900766b80ed1ae6-11731334.pdf?src-supplier=RSComponents, ComponentLink1URL=https://datasheet.ciiva.com/11731/0900766b80ed1ae6-11731334.pdf?src-supplier=RSComponents, ComponentLink2Description=https://datasheet.ciiva.com/5726/10104110-5726973.pdf?src-supplier=Farnell, ComponentLink2URL=https://datasheet.ciiva.com/5726/10104110-5726973.pdf?src-supplier=Farnell, Manufacturer Part Number=10104110-0001LF, Pricing 1="1=0,83000, 10=0,65600, 50=0,65600, 100=0,57100, 1000=0,45600, 10000=0,40800 (USD)", RoHS=No, Stock 1=23329, Supplier 1=Mouser
J2: "2.00mm (0.079\") Pitch SIL Vertical 2.4mm PC Tail Pin Header, 3.5mm mating pin height, tin, 3 contacts", Case/Package=SIL, Color=Black, Contact Resistance=30mR, Current Rating=1A, Manufacturer=Harwin, Max Operating Temperature=105°C, Min Operating Temperature=-55°C, Package Quantity=1000, Supplier Part Number 1=855-M22-2510346, Voltage Rating=650V, Category="Headers and Wire Housings", ComponentLink1Description=http://www.mouser.com/ds/2/181/M22-251-1134335.pdf?src-supplier=Mouser, ComponentLink1URL=http://www.mouser.com/ds/2/181/M22-251-1134335.pdf?src-supplier=Mouser, ComponentLink2Description=http://cdn.harwin.com/pdfs/M22-251.pdf?src-supplier=Digi-Key, ComponentLink2URL=http://cdn.harwin.com/pdfs/M22-251.pdf?src-supplier=Digi-Key, ComponentLink3Description=http://www.harwin.com/include/downloads/pdfs/2010PAGE109.PDF?src-supplier=Avnet, ComponentLink3URL=http://www.harwin.com/include/downloads/pdfs/2010PAGE109.PDF?src-supplier=Avnet, ComponentLink4Description=https://cdn.harwin.com/pdfs/M22-251.pdf?src-supplier=Digi-Key, ComponentLink4URL=https://cdn.harwin.com/pdfs/M22-251.pdf?src-supplier=Digi-Key, Connector Type="Male Pin", Contact Material=Bronze, Contact Mating Length=0.138inch, Contact Plating=Tin, Contact Type="Male Pin", Depth=2mm, Gender=Male, Housing Color=Black, Housing Material=Nylon, Length=6mm, Manufacturer Part Number=M22-2510346, Max Current Rating=1A, Mount="Through Hole", Number of Contacts=3, Number of Positions=3, Number of Rows=1, Orientation=Straight, Packaging=Bulk, Pitch=2mm, Pricing 1="1=0,24000, 10=0,18300, 50=0,18300, 100=0,14900, 1000=0,10900, 10000=0,08800 (USD)", RoHS=Yes, RoHS Compliant=Yes, Series=M22, Stock 1=3158, Supplier 1=Mouser, Termination=Solder
P1 P2: "Headers & Wire Housings Tiger Buy Socket Strip with Square Tails, 0.100 Pitch", Color=Black, Contact Resistance=10mR, Manufacturer=Samtec, Max Current Rating=7.6A, Max Operating Temperature=125°C, Max Voltage Rating (AC)=550V, Min Operating Temperature=-55°C, Supplier Part Number 1=200-SSQ10803GD, Category="Headers and Wire Housings", ComponentLink1Description=https://datasheet.ciiva.com/749/ssq-1xx-xx-xxx-x-xx-xxx-xx-x-mkt-749229.pdf?src-supplier=Digi-Key, ComponentLink1URL=https://datasheet.ciiva.com/749/ssq-1xx-xx-xxx-x-xx-xxx-xx-x-mkt-749229.pdf?src-supplier=Digi-Key, Connector Type=Receptacle, Contact Material=Bronze, Contact Plating=Gold, Contact Type="Female Socket", Depth=4.95mm, Gender=Female, Housing Color=Black, Housing Material=Polymer, Lead Free="Lead Free", Length=20.83mm, Manufacturer Part Number=SSQ-108-03-G-D, Mount="Through Hole", Number of Contacts=16, Number of Positions=16, Number of Rows=2, Orientation=Straight, Packaging=Bulk, Pitch=2.54mm, Pricing 1="1=4,53000, 10=4,34000, 50=4,34000, 100=3,62000, 500=3,07000, 1000=2,62000, 2500=2,40000, 5000=2,35000, 10000=2,29000 (USD)", RoHS=Yes, RoHS Compliant=Yes, Row Spacing=0.1inch, Series=SSQ, Stock 1=211, Supplier 1=Mouser, Termination=Solder, Width=4.95mm
Q1 Q2: "Trans Gp Bjt NPN 25V 1.5A 300MW 3-PIN SOT-23 T/r", Case/Package=TO-236-3, Collector Emitter Breakdown Voltage=25V, Collector Emitter Voltage (VCEO)=400mV, Manufacturer=Comchip, Max Collector Current=1.5A, Max Power Dissipation=300mW, Supplier Part Number 1=750-SS8050-G, Transition Frequency=100MHz, ComponentLink1Description="http://www.comchiptech.com/admin/files/product/SS8050-G RevA181526.pdf?src-supplier=Digi-Key", ComponentLink1URL="http://www.comchiptech.com/admin/files/product/SS8050-G RevA181526.pdf?src-supplier=Digi-Key", ComponentLink2Description=http://www.comchiptech.com/cms/UserFiles/SS8050-G%20RevA181526.pdf?src-supplier=Digi-Key, ComponentLink2URL=http://www.comchiptech.com/cms/UserFiles/SS8050-G%20RevA181526.pdf?src-supplier=Digi-Key, Manufacturer Part Number=SS8050-G, Max Breakdown Voltage=25V, Mount="Surface Mount", Packaging="Tape and Reel", Pricing 1="1=0,31000, 10=0,20400, 50=0,20400, 100=0,09200, 1000=0,05800, 3000=0,04400, 9000=0,03700, 10000=0,03700, 24000=0,03500, 45000=0,03300, 99000=0,02800 (USD)", RoHS=Yes, Stock 1=22728, Supplier 1=Mouser
R1 R5 R6: "Res 10K Ohm 5% 1/2W 0805", Manufacturer=Panasonic, Resistance=10K, Supplier Part Number 1=667-ERJ-UP6J103V, Category="Chip SMD Resistors", Manufacturer Part Number=ERJ-UP6J103V, Pricing 1="1=0,16000, 10=0,11900, 50=0,11900, 100=0,05800, 1000=0,02500, 10000=0,02100 (USD)", RoHS=No, Stock 1=46150, Supplier 1=Mouser
R2 R3: "RES SMD 1K OHM 5% 1/10W 0603", Case Code (Imperial)=0603, Case Code (Metric)=1608, Manufacturer=Panasonic, Max Operating Temperature=155°C, Max Power Dissipation=100mW, Min Operating Temperature=-55°C, Package Quantity=1, Resistance=1kR, Resistance Tolerance=5%, Resistor Type="Thick Film", Supplier Part Number 1=667-ERJ-3GEYJ102V, Temperature Coefficient=200ppm/°C, Voltage Rating=75V, Voltage Rating (DC)=50V, Case/Package=0603, Category="Chip SMD Resistors", ComponentLink1Description=https://datasheet.ciiva.com/34303/1988487-34303608.pdf?src-supplier=Jameco, ComponentLink1URL=https://datasheet.ciiva.com/34303/1988487-34303608.pdf?src-supplier=Jameco, ComponentLink2Description=https://datasheet.ciiva.com/11808/0900766b80f806dd-11808320.pdf?src-supplier=RSComponents, ComponentLink2URL=https://datasheet.ciiva.com/11808/0900766b80f806dd-11808320.pdf?src-supplier=RSComponents, ComponentLink3Description=https://datasheet.ciiva.com/43460/1678796-43460714.pdf?src-supplier=Farnell, ComponentLink3URL=https://datasheet.ciiva.com/43460/1678796-43460714.pdf?src-supplier=Farnell, ComponentLink4Description=https://datasheet.ciiva.com/46386/1678796-46386459.pdf?src-supplier=Element14, ComponentLink4URL=https://datasheet.ciiva.com/46386/1678796-46386459.pdf?src-supplier=Element14, ComponentLink5Description=https://datasheet.ciiva.com/22783/1678796-22783822.pdf?src-supplier=Farnell, ComponentLink5URL=https://datasheet.ciiva.com/22783/1678796-22783822.pdf?src-supplier=Farnell, ComponentLink6Description=https://datasheet.ciiva.com/46371/1678796-46371934.pdf?src-supplier=Element14, ComponentLink6URL=https://datasheet.ciiva.com/46371/1678796-46371934.pdf?src-supplier=Element14, ComponentLink7Description=https://datasheet.ciiva.com/28532/1678796-28532126.pdf?src-supplier=Element14, ComponentLink7URL=https://datasheet.ciiva.com/28532/1678796-28532126.pdf?src-supplier=Element14, ComponentLink8Description=https://datasheet.ciiva.com/46451/1678796-46451226.pdf?src-supplier=Element14, ComponentLink8URL=https://datasheet.ciiva.com/46451/1678796-46451226.pdf?src-supplier=Element14, ComponentLink9Description=https://datasheet.ciiva.com/24159/aoa0000ce1-37422-24159481.pdf?src-supplier=Mouser, ComponentLink9URL=https://datasheet.ciiva.com/24159/aoa0000ce1-37422-24159481.pdf?src-supplier=Mouser, ComponentLink10Description=https://datasheet.ciiva.com/16787/70255313-16787626.pdf?src-supplier=Allied+Electronics, ComponentLink10URL=https://datasheet.ciiva.com/16787/70255313-16787626.pdf?src-supplier=Allied+Electronics, ComponentLink11Description=https://datasheet.ciiva.com/9117/aoa0000ce1-9117035.pdf?src-supplier=Avnet, ComponentLink11URL=https://datasheet.ciiva.com/9117/aoa0000ce1-9117035.pdf?src-supplier=Avnet, ComponentLink12Description=https://datasheet.ciiva.com/16740/aoa0000ce1-16740759.pdf?src-supplier=Future+Electronics, ComponentLink12URL=https://datasheet.ciiva.com/16740/aoa0000ce1-16740759.pdf?src-supplier=Future+Electronics, ComponentLink13Description=https://datasheet.ciiva.com/48532/aoa0000ce1-48532155.pdf?src-supplier=Avnet, ComponentLink13URL=https://datasheet.ciiva.com/48532/aoa0000ce1-48532155.pdf?src-supplier=Avnet, ComponentLink14Description=https://datasheet.ciiva.com/30224/4aoa0000ce1-30224167.pdf?src-supplier=Onlinecomponents.com, ComponentLink14URL=https://datasheet.ciiva.com/30224/4aoa0000ce1-30224167.pdf?src-supplier=Onlinecomponents.com, Construction=Rectangular, Contact Plating=Tin, Depth=0.8mm, Features="Automotive AEC-Q200", Height=0.45mm, Lead Free="Lead Free", Length=1.6mm, Manufacturer Part Number=ERJ-3GEYJ102V, Military Standard=Not, Mount="Surface Mount", Number of Terminations=2, Packaging="Tape and Reel", Power Rating=100mW, Pricing 1="1=0,10000, 10=0,04400, 50=0,04400, 100=0,01800, 1000=0,00800, 2500=0,00700, 5000=0,00500, 10000=0,00500 (USD)", Radiation Hardening=No, REACH SVHC="No SVHC", RoHS=Yes, RoHS Compliant=Yes, Series=ERJ, Stock 1=2053319, Supplier 1=Mouser, Technology="THICK FILM", Termination=SMD/SMT, Tolerance=5%, Weight=7.1E-05oz, Width=0.031inch, Working Voltage=75V
R12: "Res Thick Film 0805 249K Ohm 1% 1/8W ±100ppm/°C Molded SMD Punched Carrier T/R", Case Code (Imperial)=0805, Case Code (Metric)=2012, Manufacturer=Panasonic, Max Operating Temperature=155°C, Max Power Dissipation=125mW, Min Operating Temperature=-55°C, Package Quantity=5000, Resistance=249kR, Resistance Tolerance=1%, Resistor Type="Thick Film", Supplier Part Number 1=667-ERJ-6ENF2493V, Temperature Coefficient=100ppm/°C, Voltage Rating=150V, Case/Package=0805, Category="Chip SMD Resistors", ComponentLink1Description=https://datasheet.ciiva.com/11821/0900766b80f80784-11821592.pdf?src-supplier=RSComponents, ComponentLink1URL=https://datasheet.ciiva.com/11821/0900766b80f80784-11821592.pdf?src-supplier=RSComponents, ComponentLink2Description=https://datasheet.ciiva.com/16770/70260748-16770245.pdf?src-supplier=Allied+Electronics, ComponentLink2URL=https://datasheet.ciiva.com/16770/70260748-16770245.pdf?src-supplier=Allied+Electronics, ComponentLink3Description=https://datasheet.ciiva.com/30160/aoa0000ce2-30160949.pdf?src-supplier=Onlinecomponents.com, ComponentLink3URL=https://datasheet.ciiva.com/30160/aoa0000ce2-30160949.pdf?src-supplier=Onlinecomponents.com, ComponentLink4Description=https://datasheet.ciiva.com/43460/426256-43460070.pdf?src-supplier=Farnell, ComponentLink4URL=https://datasheet.ciiva.com/43460/426256-43460070.pdf?src-supplier=Farnell, ComponentLink5Description=https://datasheet.ciiva.com/9183/aoa0000ce2-9183882.pdf?src-supplier=Avnet, ComponentLink5URL=https://datasheet.ciiva.com/9183/aoa0000ce2-9183882.pdf?src-supplier=Avnet, ComponentLink6Description=https://datasheet.ciiva.com/46377/426256-46377786.pdf?src-supplier=Element14, ComponentLink6URL=https://datasheet.ciiva.com/46377/426256-46377786.pdf?src-supplier=Element14, ComponentLink7Description=https://datasheet.ciiva.com/28692/1678782-28692523.pdf?src-supplier=Element14, ComponentLink7URL=https://datasheet.ciiva.com/28692/1678782-28692523.pdf?src-supplier=Element14, ComponentLink8Description=https://datasheet.ciiva.com/28594/1678782-28594733.pdf?src-supplier=Element14, ComponentLink8URL=https://datasheet.ciiva.com/28594/1678782-28594733.pdf?src-supplier=Element14, ComponentLink9Description=https://datasheet.ciiva.com/29927/aoa0000ce2-29927535.pdf?src-supplier=Avnet, ComponentLink9URL=https://datasheet.ciiva.com/29927/aoa0000ce2-29927535.pdf?src-supplier=Avnet, Construction=Rectangular, Contact Plating=Tin, Depth=1.25mm, Height=0.6mm, Lead Free="Lead Free", Length=2mm, Manufacturer Part Number=ERJ-6ENF2493V, Military Standard=Not, Mount="Surface Mount", Number of Terminations=2, Packaging="Tape and Reel", Power Rating=125mW, Pricing 1="1=0,11000, 10=0,08300, 50=0,08300, 100=0,03200, 1000=0,01400, 10000=0,01000 (USD)", Radiation Hardening=No, REACH SVHC=Unknown, RoHS=Yes, RoHS Compliant=Yes, Series=ERJ, Stock 1=22124, Supplier 1=Mouser, Technology="THICK FILM", Termination=SMD/SMT, Tolerance=1%, Voltage Rating (DC)=150V, Width=1.2mm
RDM RDP: "Res Thick Film 0805 27 Ohm 1% 0.25W ±300ppm/°C Molded SMD Punched Carrier T/R", Case Code (Imperial)=0805, Case Code (Metric)=2012, Manufacturer=Panasonic, Max Operating Temperature=155°C, Min Operating Temperature=-55°C, Power Rating=500mW, Resistance=27R, Resistor Type="Thick Film", Supplier Part Number 1=667-ERJ-P06F27R0V, Temperature Coefficient=300ppm/°C, Tolerance=1%, Voltage Rating=150V, Case/Package=0805, Category="Chip SMD Resistors", ComponentLink1Description=https://datasheet.ciiva.com/11810/0900766b812cb812-11810836.pdf?src-supplier=RSComponents, ComponentLink1URL=https://datasheet.ciiva.com/11810/0900766b812cb812-11810836.pdf?src-supplier=RSComponents, ComponentLink2Description=https://datasheet.ciiva.com/48426/erjp-series-eng-tds-48426807.pdf?src-supplier=Distrelec, ComponentLink2URL=https://datasheet.ciiva.com/48426/erjp-series-eng-tds-48426807.pdf?src-supplier=Distrelec, ComponentLink3Description=https://datasheet.ciiva.com/5915/1801181-5915438.pdf?src-supplier=Farnell, ComponentLink3URL=https://datasheet.ciiva.com/5915/1801181-5915438.pdf?src-supplier=Farnell, ComponentLink4Description=https://datasheet.ciiva.com/7891/1801181-7891423.pdf?src-supplier=Element14, ComponentLink4URL=https://datasheet.ciiva.com/7891/1801181-7891423.pdf?src-supplier=Element14, ComponentLink5Description=https://datasheet.ciiva.com/5915/1801181-5915437.pdf?src-supplier=Farnell, ComponentLink5URL=https://datasheet.ciiva.com/5915/1801181-5915437.pdf?src-supplier=Farnell, ComponentLink6Description=https://datasheet.ciiva.com/24125/aoa0000ce4-64075-24125050.pdf?src-supplier=Mouser, ComponentLink6URL=https://datasheet.ciiva.com/24125/aoa0000ce4-64075-24125050.pdf?src-supplier=Mouser, ComponentLink7Description=https://datasheet.ciiva.com/9297/aoa0000ce4-9297918.pdf?src-supplier=Avnet, ComponentLink7URL=https://datasheet.ciiva.com/9297/aoa0000ce4-9297918.pdf?src-supplier=Avnet, Contact Plating=Tin, Depth=1.25mm, Height=0.6mm, Length=2mm, Manufacturer Part Number=ERJ-P06F27R0V, Military Standard=Not, Mount="Surface Mount", Number of Pins=2, Packaging="Tape and Reel", Pricing 1="1=0,20000, 10=0,16900, 50=0,16900, 100=0,06700, 1000=0,02800, 10000=0,02300 (USD)", Radiation Hardening=No, REACH SVHC="No SVHC", RoHS=Yes, RoHS Compliant=Yes, Stock 1=25086, Supplier 1=Mouser, Termination=SMD/SMT, Voltage Rating (DC)=150V, Weight=0.000194oz, Width=1.2mm
U1: "Bluetooth and Wi-Fi Module / 2.4GHz to 2.5GHz 2.7V to 3.6V 16MB Flash / 38-Pin SMD Module", Manufacturer="Espressif Systems", Supplier Part Number 1=356-ES32WROOM32D16MB, Category=Uncategorized, Manufacturer Part Number=ESP32-WROOM-32D-N16, Pricing 1="1=4,65000, 10=4,65000, 50=4,65000, 100=4,65000, 1000=4,65000, 10000=4,65000 (USD)", RoHS=No, Stock 1=6841, Supplier 1=Mouser
U2: "FT231XS-U, Usb Controller, 3MBD, Usb 1.1, Usb 2.0, 5 V, 20-PIN SSOP", Case/Package=SSOP, Manufacturer=FTDI, Max Operating Temperature=85°C, Max Supply Voltage=5.5V, Min Operating Temperature=-40°C, Min Supply Voltage=2.97V, Operating Supply Voltage=5V, Package Quantity=58, Supplier Part Number 1=895-FT231XS-U, Category="Interface ICs", ComponentLink1Description=https://datasheet.ciiva.com/48909/70403933-48909079.pdf?src-supplier=Allied+Electronics, ComponentLink1URL=https://datasheet.ciiva.com/48909/70403933-48909079.pdf?src-supplier=Allied+Electronics, ComponentLink2Description=https://datasheet.ciiva.com/15150/getdatasheetpartid-643513-15150507.pdf?src-supplier=Verical, ComponentLink2URL=https://datasheet.ciiva.com/15150/getdatasheetpartid-643513-15150507.pdf?src-supplier=Verical, ComponentLink3Description=https://datasheet.ciiva.com/16379/ds-ft231x-16379279.pdf?src-supplier=Future+Electronics, ComponentLink3URL=https://datasheet.ciiva.com/16379/ds-ft231x-16379279.pdf?src-supplier=Future+Electronics, Data Rate=3Mbps, ESD Protection=Yes, Height=1.5mm, Lead Free="Lead Free", Length=8.74mm, Manufacturer Part Number=FT231XS-U, Mount="Surface Mount", Number of Channels=1, Number of Pins=20, Number of Transceivers=1, Packaging=Rail/Tube, Pricing 1="1=2,34000, 10=2,34000, 25=2,27000, 50=2,27000, 100=2,27000, 116=2,20000, 1000=1,82000, 10000=1,75000 (USD)", Radiation Hardening=No, RoHS=Yes, RoHS Compliant=Yes, Stock 1=294, Supplier 1=Mouser, Width=3.99mm
U3: "TVS二极管 5V IPPM=3A 50W 单向", Capacitance=0.9pF, Case/Package=SC, Clamping Voltage=18V, Current=3A, Leakage Current=1uA, Manufacturer=Semtech, Max Breakdown Voltage=6V, Max Operating Temperature=125°C, Max Power Dissipation=50W, Min Operating Temperature=-55°C, Power Line Protection=Yes, Reverse Standoff Voltage=5V, Supplier Part Number 1=947-RCLAMP0502A.TCT, Test Current=1mA, Category="TVS Diodes", Clamping Voltage-Max=18V, ComponentLink1Description=https://datasheet.ciiva.com/17052/0900766b80d896e8-17052765.pdf?src-supplier=Allied+Electronics, ComponentLink1URL=https://datasheet.ciiva.com/17052/0900766b80d896e8-17052765.pdf?src-supplier=Allied+Electronics, ComponentLink2Description=https://datasheet.ciiva.com/16208/rclamp0502a-16208898.pdf?src-supplier=Future+Electronics, ComponentLink2URL=https://datasheet.ciiva.com/16208/rclamp0502a-16208898.pdf?src-supplier=Future+Electronics, ComponentLink3Description=https://datasheet.ciiva.com/18065/getdatasheetpartid-185280-18065939.pdf?src-supplier=Verical, ComponentLink3URL=https://datasheet.ciiva.com/18065/getdatasheetpartid-185280-18065939.pdf?src-supplier=Verical, ComponentLink4Description=https://datasheet.ciiva.com/338/rclamp0502a-338509.pdf?src-supplier=Digi-Key, ComponentLink4URL=https://datasheet.ciiva.com/338/rclamp0502a-338509.pdf?src-supplier=Digi-Key, ComponentLink5Description=https://datasheet.ciiva.com/338/rclamp0502a-338510.pdf?src-supplier=Digi-Key, ComponentLink5URL=https://datasheet.ciiva.com/338/rclamp0502a-338510.pdf?src-supplier=Digi-Key, ComponentLink6Description=https://datasheet.ciiva.com/338/rclamp0502a-338508.pdf?src-supplier=Digi-Key, ComponentLink6URL=https://datasheet.ciiva.com/338/rclamp0502a-338508.pdf?src-supplier=Digi-Key, Direction=Unidirectional, Element Configuration=Single, ESD Protection=Yes, Height=0.6mm, Lead Free="Lead Free", Length=1.6mm, Manufacturer Part Number=RCLAMP0502A.TCT, Max Reverse Leakage Current=1uA, Min Breakdown Voltage=6V, Mount="Surface Mount", Number of Bidirectional Channels=2, Number of Channels=2, Number of Elements=1, Number of Pins=6, Packaging="Tape and Reel", Peak Pulse Current=3A, Peak Pulse Power=50W, Polarity=Unidirectional, Pricing 1="1=0,91000, 10=0,79900, 50=0,79900, 100=0,61300, 1000=0,38800, 10000=0,35000 (USD)", Radiation Hardening=No, Reverse Breakdown Voltage=6V, RoHS=Yes, RoHS Compliant=Yes, Series=RailClamp®, Stock 1=213169, Supplier 1=Mouser, Voltage=5V, Width=1.2mm
U4: "Automotive 1-A, 10-V, low-dropout voltage regulator with enable 20-HTSSOP -40 to 125", Case/Package=HTSSOP, Dropout Voltage=350mV, Input Bias Current=85uA, Manufacturer="Texas Instruments", Max Input Voltage=10V, Max Operating Temperature=125°C, Max Output Current=1A, Max Output Voltage=3.3V, Max Power Dissipation=7.2W, Min Input Voltage=2.7V, Min Operating Temperature=-40°C, Output Voltage Accuracy=2%, Package Quantity=1, Quiescent Current=80uA, Supplier Part Number 1=595-TPS76733QPWPRQ1, Accuracy=2%, Category="Voltage Regulators - Linear", ComponentLink1Description=https://datasheet.ciiva.com/2046/tps76715-q1-2046224.pdf?src-supplier=Digi-Key, ComponentLink1URL=https://datasheet.ciiva.com/2046/tps76715-q1-2046224.pdf?src-supplier=Digi-Key, ComponentLink2Description=https://datasheet.ciiva.com/14275/tps76733-q1-14275667.pdf?src-supplier=Avnet, ComponentLink2URL=https://datasheet.ciiva.com/14275/tps76733-q1-14275667.pdf?src-supplier=Avnet, ComponentLink3Description=https://datasheet.ciiva.com/2046/tps76715-q1-2046223.pdf?src-supplier=Digi-Key, ComponentLink3URL=https://datasheet.ciiva.com/2046/tps76715-q1-2046223.pdf?src-supplier=Digi-Key, ComponentLink4Description=https://datasheet.ciiva.com/2046/tps76715-q1-2046222.pdf?src-supplier=Digi-Key, ComponentLink4URL=https://datasheet.ciiva.com/2046/tps76715-q1-2046222.pdf?src-supplier=Digi-Key, Lead Free="Lead Free", Manufacturer Part Number=TPS76733QPWPRQ1, Min Output Voltage=3.3V, Number of Outputs=1, Number of Pins=20, Number of Regulators=1, Output Current=1A, Output Type=Fixed, Output Voltage=3.3V, Packaging="Tape and Reel", Polarity=Positive, Power Dissipation=7.2W, Pricing 1="1=5,02000, 10=4,51000, 50=4,26000, 100=3,70000, 1000=2,75000, 10000=2,75000 (USD)", Radiation Hardening=No, REACH SVHC=Unknown, RoHS=Yes, RoHS Compliant=Yes, Series="Automotive, AEC-Q100", Stock 1=472, Supplier 1=Mouser

## Free pads (board coordinates)
  round 2.75 hole 2.75 unplated: MH3(3.1,5) MH3(3.1,33.4) MH3(37.9,5) MH3(37.9,33.4)

## Via types
v1: diameter 0.6, hole 0.3, Top Layer to Bottom Layer, 46 vias
v2: diameter 0.6, hole 0.3, Top Layer to Bottom Layer, tented bottom, 12 vias
v3: diameter 0.5, hole 0.2, Top Layer to Bottom Layer, 6 vias

## Nets (pads, with @x,y where several pads share a name; then routed paths per layer and width w, separated by ;. In a path a pad name is that pad's centre, name@x,y a point inside that pad or via, vN(x,y) a via of type N, cw(c..) or ccw(c..) an arc to the next point about the centre after c; other vN are vias at no path point)
3V3: C1.1 C2.1 C18.1 P1.13 P2.13 R1.1 R12.1 U1.2 U4.13 U4.14 | length 9.9
  Top Layer w0.5: C1.1 C2.1 8.452,34.202 9.774,34.202 10.173,34.6 10.227,34.6 10.417,34.79 11.55,34.79 U1.2
  Bottom Layer w0.5: v1(6.693,29.4) 6.712,29.381 8.119,29.381 R1.1 ; v1(17.65,9.6) R12.1
  other v1: 16.8,7.6 19.1,7.6 16.8,8.8 19.1,8.8 10.2,34.6
5V: C17.1 J2.2 P1.14 P2.14 U4.6 U4.7
5VEXT: J2.3 P1.16 P2.16 | length 42.3
  Bottom Layer w0.5: J2.3 5.45,-1.3 21.4,-1.3 23.75,1.05 33.5,1.05 35.1,2.65 35.1,6.04 P2.16
DTR: Q2.2 R5.1 U2.1 | length 18.5
  Top Layer w0.3: U2.1 27.554,13.057 27.6,13.104 27.6,13.6 31.299,17.299 31.947,17.299 v1(32,17.247)
  Bottom Layer w0.3: v1(32,17.247) 32,17.299 32.55,17.849 32.55,28.35 R5.1
EN: C3.1 C4.1 Q1.3 R1.2 RST.1 U1.3 | length 67.1
  Top Layer w0.3: v1(30.5,2.9) 30.5,1.901 C4.1
  Top Layer w0.5: U1.3 13.2,33.72 v1(13.21,33.71)
  Bottom Layer w0.3: R1.2 C3.1 8.361,33.71 v1(13.21,33.71) 23.4,33.71 ; v1(30.5,2.9) 30.45,2.95 RST.1 26.85,2.95 26.6,3.2 26.6,3.9 25.4,5.1 25.4,7.5 27.7,9.8 27.7,12.8 23.4,17.1 23.4,33.71 ; Q1.3 29.801,34.601 28.91,33.71 23.4,33.71
GND: BOOT.2 C1.2 C2.2 C3.2 C4.2 C5.2 C6.2 C7.2 C8.2 C9.2 C17.2 C18.2 CM.2 CP.2 J1.5 J1.6 J1.7 J1.8 J1.9 P1.15 P2.15 RST.2 U1.1 U1.15 U1.38 U1.39 U2.6 U2.16 U3.2 U4.1 U4.2 U4.3 U4.5 U4.9 U4.10 U4.11 U4.12 U4.19 U4.20 U4.21 | length 79.2
  Top Layer w0.3: v1(21.025,3.7) 21.025,4.482 21.443,4.9 U3.2
  Top Layer w0.35: U4.9 U4.10 8.675,5.075 v1(9.3,4.45) ; U4.5 10.675,9.875 v3(11,9.55) ; U4.1 U4.2 U4.3 10.415,11.175 10.94,10.65 v3(11,10.65) ; v3(12.1,8.45) 12.16,8.45 12.575,8.035 12.575,7.975 13.275,7.275 U4.12 U4.11 ; v3(12.1,10.65) 12.16,10.65 12.575,11.065 12.575,11.125 13.275,11.825 U4.19 U4.20
  Top Layer w0.4: 19.3,1.15 J1.5 v1(19.3,3.2) ; v1(23.55,-0.85) 23.604,-0.85 24.053,-0.401 CP.2 CM.2 28.601,-0.1 v1(29.6,-0.1) ; v1(25.275,9.9) 25.292,9.882 U2.6 ; U2.16 35.917,10.517 36.324,10.11 P2.15
  Top Layer w0.5: v1(6.8,28.5) 6.827,28.5 7.048,28.721 7.446,28.721 7.899,29.174 C1.2 ; C2.2 8.452,36.003 9.631,36.003 9.888,36.26 v1(9.915,36.26) U1.1 ; C17.2@9.3,3.651 v1(9.3,4.45) ; J1.8 J1.6 J1.7 ; U1.15 14.8,18.485 v1(14.8,16.7) ; C18.2 17.85,13.675 18.681,14.506 19.131,14.506 v1(19.15,14.525) 19.15,14.498 19.796,13.852 19.796,13.779 20.249,13.326 22.975,13.326 C6.2 ; 19.3,1.15 19.3,-0.7 J1.7 ; v1(23.55,-0.85) J1.9 J1.7 ; U1.38 29.291,36.219 30.631,36.219 v1(30.65,36.2) ; v1(29.6,-0.1) 30.699,-0.1 C4.2 C5.2
  Bottom Layer w0.4: C8.2 21.199,11.326 19.15,13.375 v1(19.15,14.525) 19.204,14.525 19.729,14 C9.2
  Bottom Layer w0.5: C3.2 8.752,35.903 9.531,35.903 9.888,36.26 v1(9.915,36.26) ; RST.2 28.05,-1.25 29.181,-0.119 29.581,-0.119 v1(29.6,-0.1) 30.65,-0.1 31.8,-1.25 BOOT.2
  other v1: 9.3,5.4 10.8,5.4 12.3,5.45 13.8,5.45 9.35,14.05 10.85,14.05 12.35,14.1 13.85,14.1
  other v2: 18.3,27.14 19.7,27.14 17.6,27.84 19,27.84 20.4,27.84 18.3,28.54 19.7,28.54 17.6,29.24 19,29.24 20.4,29.24 18.3,29.94 19.7,29.94
  other v3: 11,8.45 12.1,9.55
GPIO2: P2.12 U1.24 | length 14.5
  Top Layer w0.3: U1.24 33,18.5 35,16.5 38.15,16.5 39.17,15.48 P2.12
GPIO4: P2.10 U1.26 | length 11.3
  Top Layer w0.3: U1.26 33.23,21.02 35.25,19 37.75,19 39.02,17.73 P2.10
GPIO12: P1.11 U1.14 | length 11.8
  Top Layer w0.3: P1.11 3.04,16.4 6.4,16.4 9.75,19.75 U1.14
GPIO13: P1.12 U1.16 | length 14.6
  Top Layer w0.3: P1.12 6.49,15.19 9.59,18.29 12.42,18.29 14.01,19.88 15.38,19.88 15.755,19.505 15.755,18.8 U1.16
GPIO14: P1.10 U1.13 | length 8.7
  Top Layer w0.3: P1.10 6.48,17.73 9.77,21.02 U1.13
GPIO15: P2.11 U1.23 | length 13.9
  Top Layer w0.3: U1.23 25.245,18.2 25.245,17.779 25.3,17.724 25.3,17.526 25.476,17.35 28.52,17.35 29.07,17.9 32.65,17.9 35.36,15.19 P2.11
GPIO16: P2.07 U1.27 | length 8.2
  Top Layer w0.3: U1.27 33.16,22.29 35.18,20.27 P2.07
GPIO17: P2.08 U1.28 | length 11.3
  Top Layer w0.3: U1.28 33.24,23.56 35.3,21.5 37.94,21.5 P2.08
GPIO21: P2.04 U1.33 | length 11.8
  Top Layer w0.3: U1.33 32.34,29.91 35.7,26.55 37.97,26.55 P2.04
GPIO22: P2.01 U1.36 | length 9.8
  Top Layer w0.3: U1.36 30.8,33.72 P2.01
GPIO25: P1.07 U1.10 | length 11.8
  Top Layer w0.3: P1.07 3.06,21.5 6.75,21.5 9.78,24.53 11.45,24.53 U1.10
GPIO26: P1.08 U1.11 | length 8.7
  Top Layer w0.3: P1.08 6.52,20.27 9.81,23.56 U1.11
GPIO27: P1.09 U1.12 | length 11.8
  Top Layer w0.3: P1.09 3.1,19 6.35,19 9.64,22.29 U1.12
GPIO32: P1.05 U1.8 | length 11.8
  Top Layer w0.3: P1.05 2.11,22.81 3.35,24.05 7.629,24.05 10.649,27.07 11.45,27.07 U1.8
GPIO33: P1.06 U1.9 | length 8.7
  Top Layer w0.3: P1.06 7.16,22.81 10.45,26.1 U1.9
GPIO34: P1.03 U1.6 | length 12.2
  Top Layer w0.3: P1.03 3.13,26.65 8.806,26.65 10.144,27.988 10.144,28.733 11.02,29.61 11.45,29.61 U1.6
GPIO35: P1.04 U1.7 | length 9
  Top Layer w0.3: P1.04 4.488,25.35 5.238,26.1 8.968,26.1 10.647,27.779 10.647,28.164 10.823,28.34 11.45,28.34 U1.7
GPIO36: P1.01 U1.4 | length 14.4
  Top Layer w0.3: P1.01 3.09,29.15 5,29.15 6.4,27.75 8.478,27.75 8.846,28.118 8.85,28.118 9.1,28.367 9.1,30.8 10.45,32.15 11.45,32.15 U1.4
GPIO39: P1.02 U1.5 | length 10.3
  Top Layer w0.3: P1.02 4.407,27.853 5.585,27.853 6.192,27.247 8.691,27.247 9.603,28.159 9.603,28.168 9.627,28.191 9.627,29.927 10.58,30.88 11.45,30.88 U1.5
IO0: BOOT.1 C5.1 P2.09 Q2.3 U1.25 | length 34.4
  Top Layer w0.3: U1.25 v1(31.65,19.75) 33.1,19.75 35.12,17.73 P2.09 ; v1(33.6,3.8) 33.6,3.719 33.7,3.619 C5.1
  Bottom Layer w0.3: Q2.3@31.625,24.099 31.625,19.775 v1(31.65,19.75) 31.65,18.3 31.1,17.75 31.1,16.95 34.2,13.85 34.2,4.461 33.6,3.861 v1(33.6,3.8) 33.6,3.778 33.25,3.428 33.25,3.2 33,2.95 BOOT.1
NetC9_1: C9.1 U2.3 U2.13 U2.14 | length 11.6
  Top Layer w0.4: v1(25.4,12.1) 25.454,12.1 25.767,11.787 U2.3 27.964,11.787 29.193,10.558 29.193,10.007 29.953,9.247 U2.14 U2.13
  Bottom Layer w0.5: C9.1 23.001,13.974 24.856,12.119 25.381,12.119 v1(25.4,12.1)
NetFB1_2: FB1.2 U2.15 | length 3.7
  Top Layer w0.4: 30.517,9.897 30.532,9.882 U2.15
  Top Layer w0.5: v1(30.1,11.25) 30.119,11.231 30.119,10.296 30.517,9.897
  Bottom Layer w0.5: FB1.2 29.106,11.269 30.081,11.269 v1(30.1,11.25)